# EAGLE board BC127_Breakout-Panel-v10 (EAGLE 6.5.0), part 1 of 3
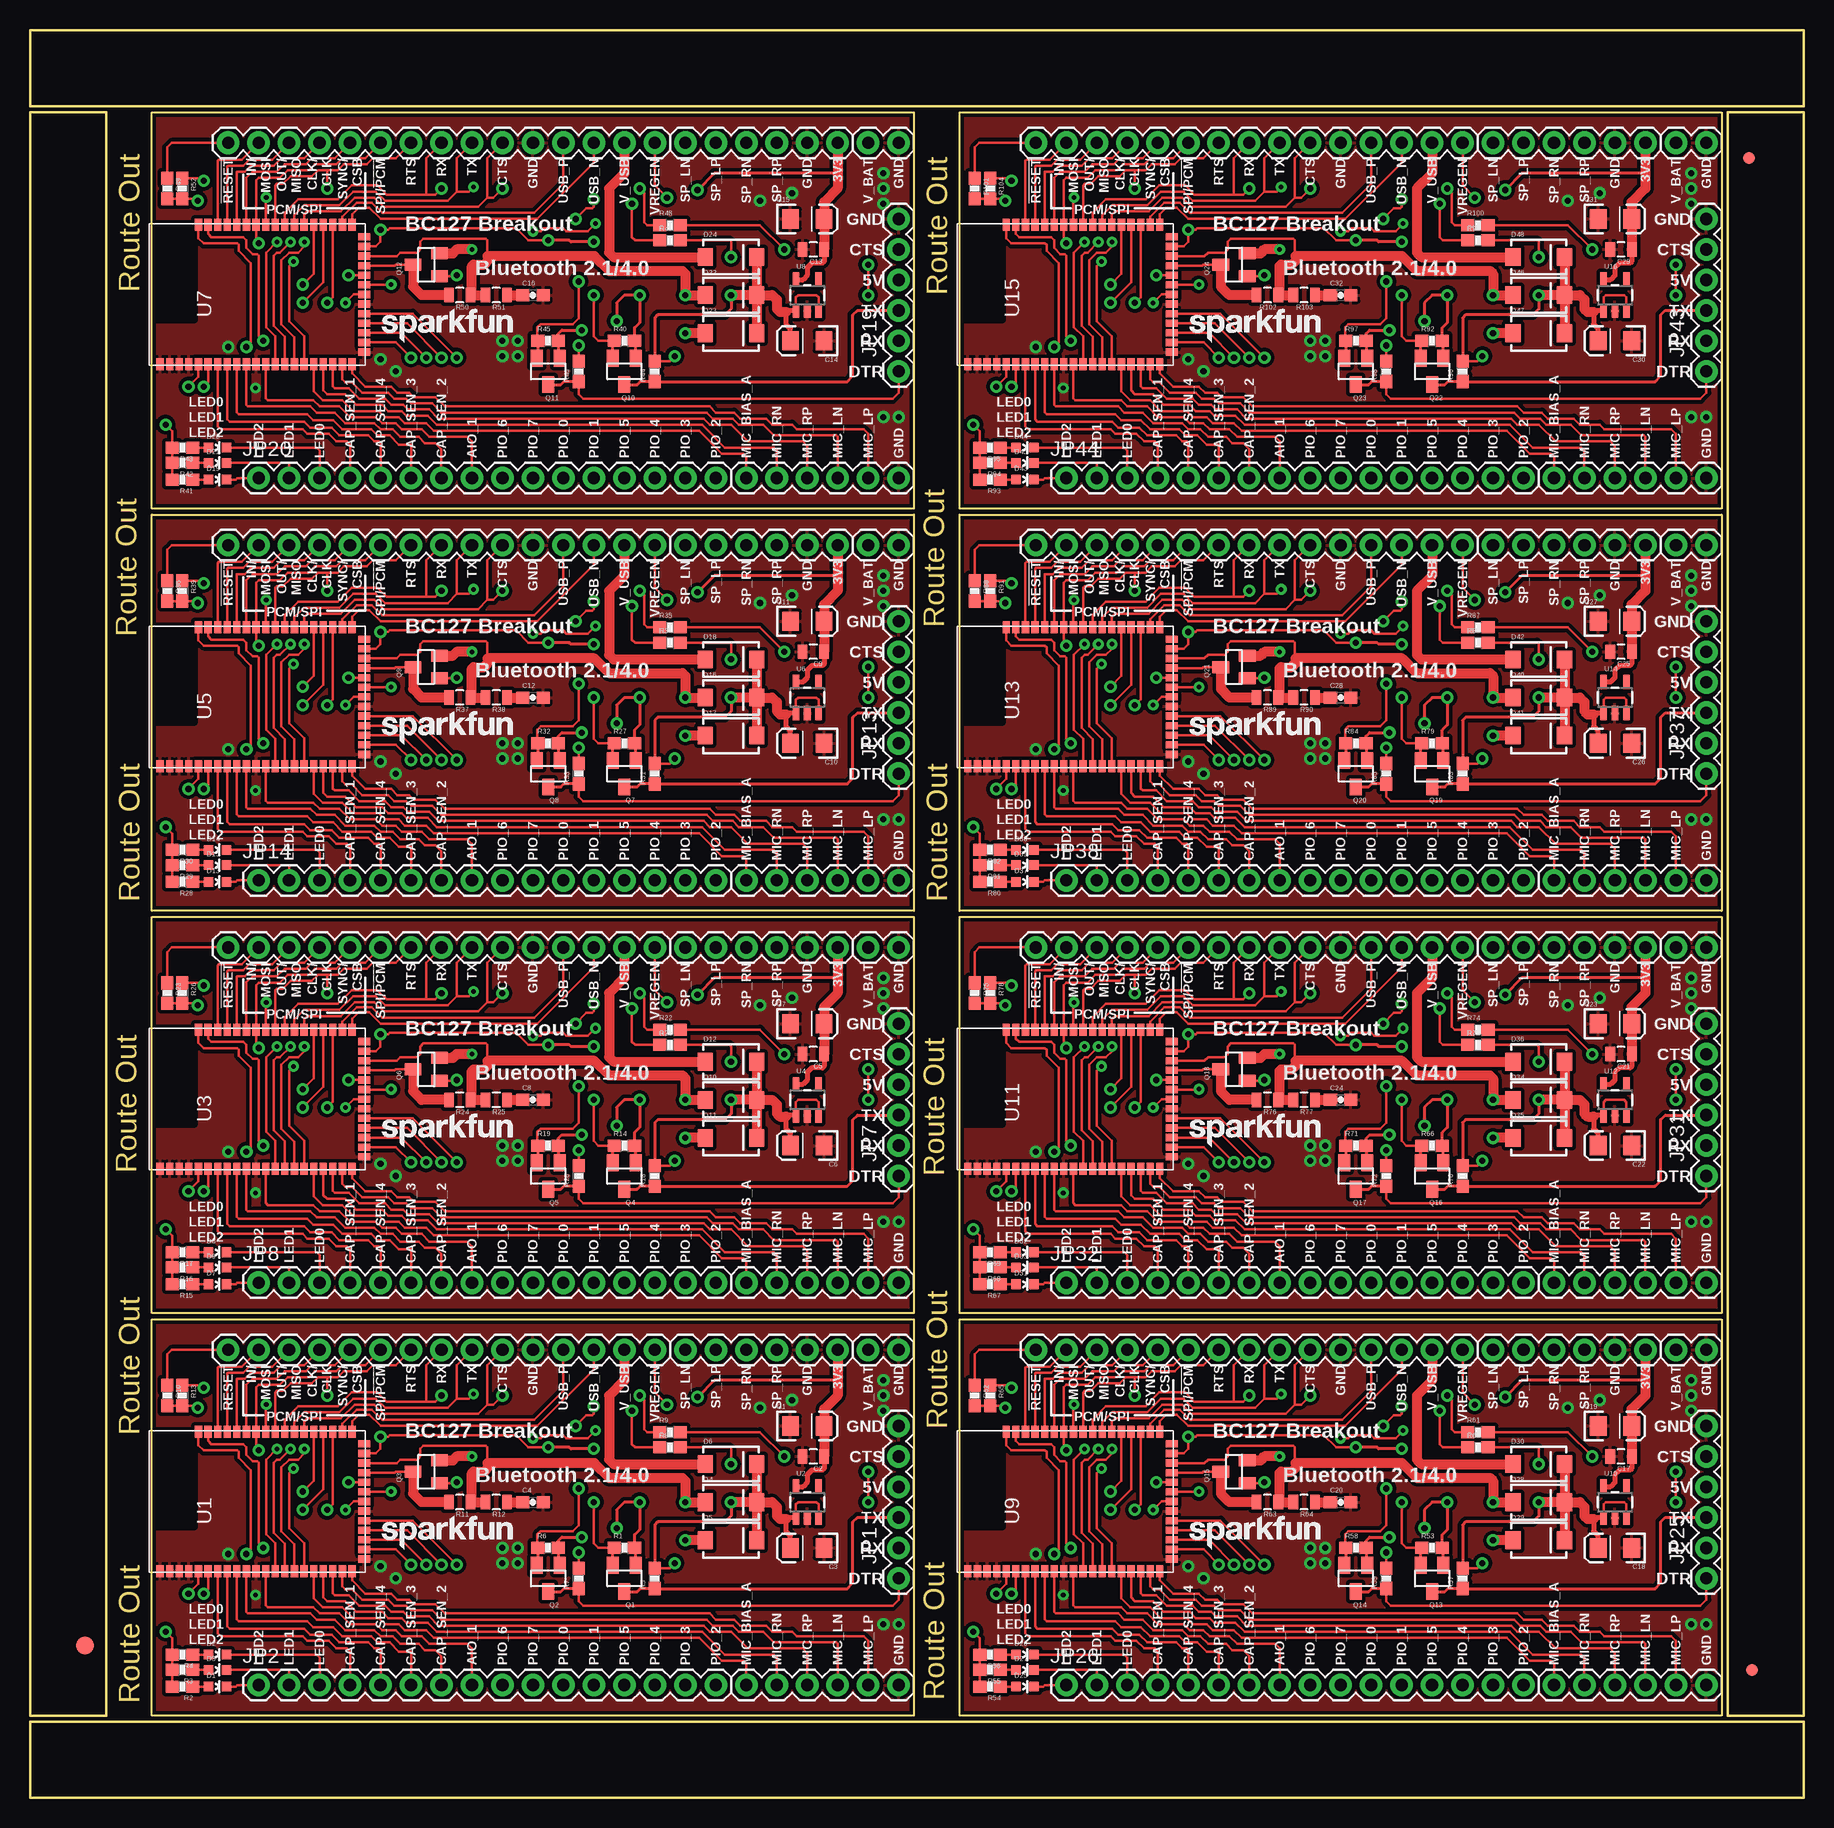
[diagram p0: board, top side]
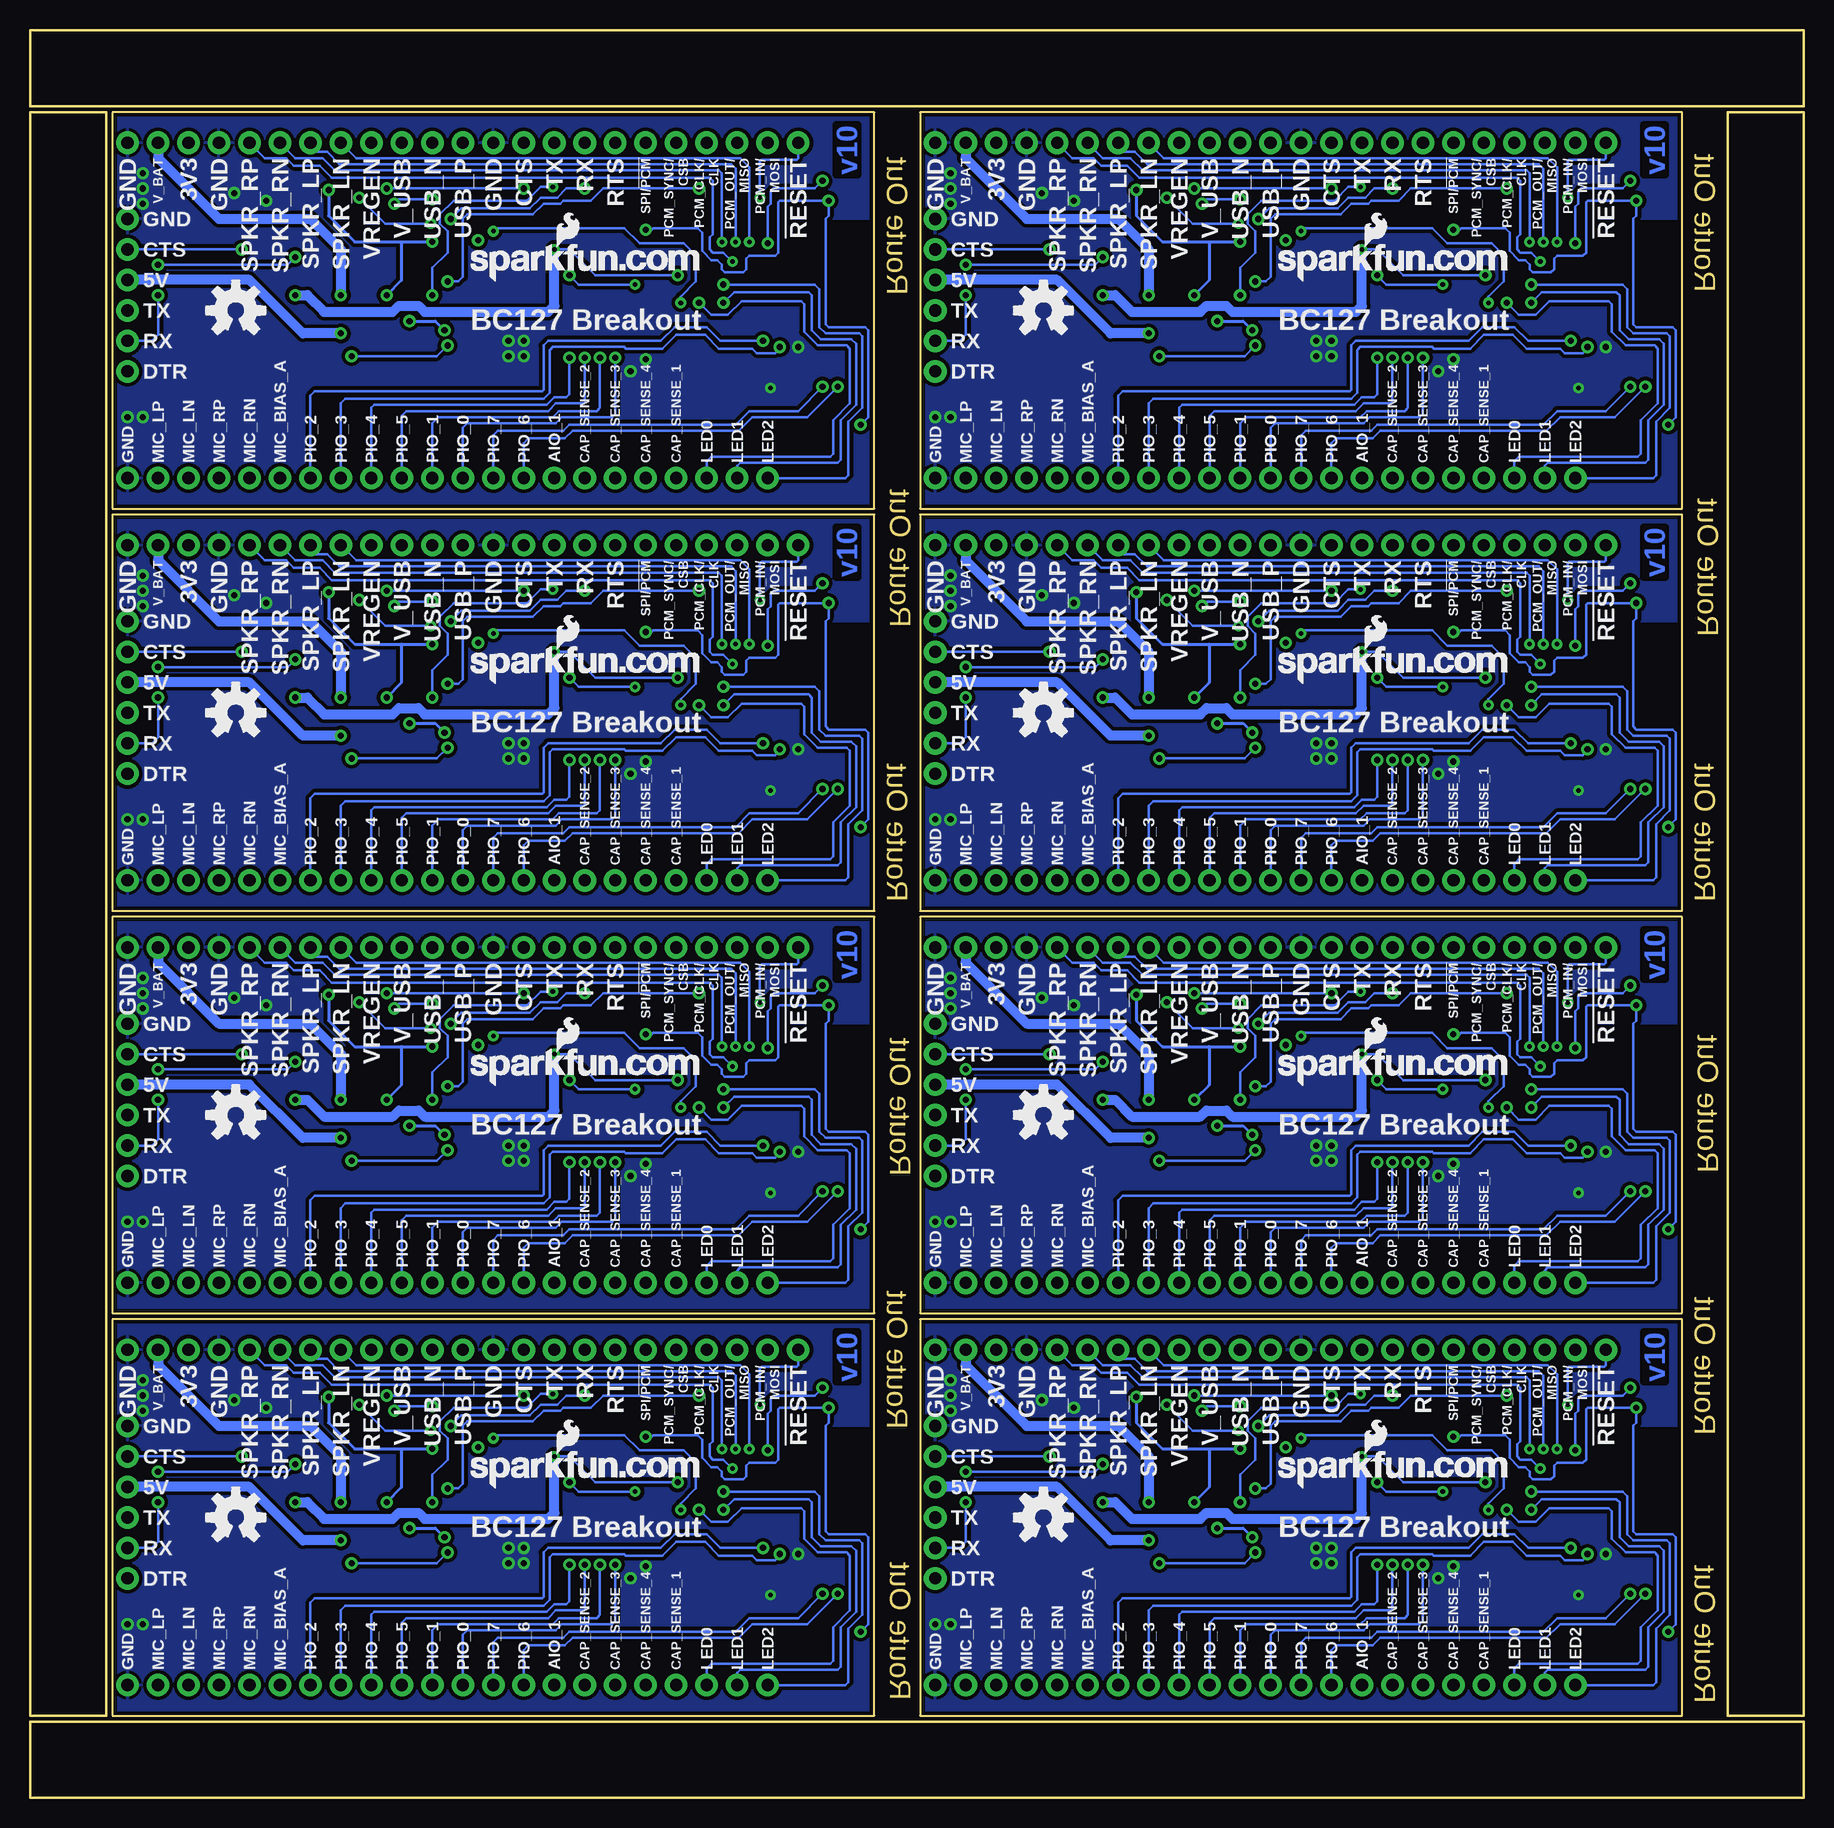
[diagram p1: board, bottom side, seen from below]

Size 147.83 x 147.32 mm. Coordinates in mm from the lower left corner, seen from the top.
Outline: 10.16,6.86 10.16,39.88 73.66,39.88 73.66,6.86 10.16,6.86
Outline: 10.16,40.39 10.16,73.41 73.66,73.41 73.66,40.39 10.16,40.39
Outline: 10.16,73.91 10.16,106.93 73.66,106.93 73.66,73.91 10.16,73.91
Outline: 10.16,107.44 10.16,140.46 73.66,140.46 73.66,107.44 10.16,107.44
Outline: 77.47,6.86 77.47,39.88 140.97,39.88 140.97,6.86 77.47,6.86
Outline: 77.47,40.39 77.47,73.41 140.97,73.41 140.97,40.39 77.47,40.39
Outline: 77.47,73.91 77.47,106.93 140.97,106.93 140.97,73.91 77.47,73.91
Outline: 77.47,107.44 77.47,140.46 140.97,140.46 140.97,107.44 77.47,107.44
Outline: 6.35,6.86 6.35,140.46 0,140.46 0,6.86 6.35,6.86
Outline: 0,0 147.83,0 147.83,6.35 0,6.35 0,0
Outline: 147.83,6.86 147.83,140.46 141.48,140.46 141.48,6.86 147.83,6.86
Outline: 147.83,147.32 0,147.32 0,140.97 147.83,140.97 147.83,147.32
Copper layers (1*16): Top 0.035mm / dielectric 1.5mm / Bottom 0.035mm
Design rules "Sparkfun *": minimum track width 8mil, minimum drill 20mil, track to track 8mil, track to pad 8mil, pad to pad 8mil, via to via 8mil, smd to smd 8mil, copper to edge 8mil, drill to drill 8mil, minimum pad ring 12mil, minimum via ring 10mil, stop-mask expansion 4mil, vias tented up to drill 20mil, thermal gap 10mil

## Footprints (pad centres in the part's own frame; a part is rotated, then mirrored left to right if it is on the bottom)
EIA3216 = smd 1.4 x 1.6: A 1.4,0; C -1.4,0
0805 = smd 0.8 x 1.2: 1 -0.9,0; 2 0.9,0
0603-CAP = smd 1.1 x 1: 1 -0.85,0; 2 0.85,0
LED-0603 = smd 0.8 x 0.8: A 0,-0.75; C 0,0.75
SMA-DIODE = smd 1.27 x 1.47: A -2.15,0; C 2.15,0
FIDUCIAL-1.5X3 = smd 1.5 x 1.5: 1 0,0
FIDUCIAL-1X2 = smd 1 x 1: 1 0,0
FTDI_BASIC = drill 1.016 pad 1.88: CTS 10.16,0; DTR 0,0; GND 12.7,0; RXI 2.54,0; TXO 5.08,0; VCC 7.62,0
1X16 = drill 1.016 pad 1.88: 1 0,0; 2 2.54,0; 3 5.08,0; 4 7.62,0; 5 10.16,0; 6 12.7,0; 7 15.24,0; 8 17.78,0; 9 20.32,0; 10 22.86,0; 11 25.4,0; 12 27.94,0; 13 30.48,0; 14 33.02,0; 15 35.56,0; 16 38.1,0
1X15 = drill 1.016 pad 1.88: 1 0,0; 2 2.54,0; 3 5.08,0; 4 7.62,0; 5 10.16,0; 6 12.7,0; 7 15.24,0; 8 17.78,0; 9 20.32,0; 10 22.86,0; 11 25.4,0; 12 27.94,0; 13 30.48,0; 14 33.02,0; 15 35.56,0
1X06 = drill 1.016 pad 1.88: 1 0,0; 2 2.54,0; 3 5.08,0; 4 7.62,0; 5 10.16,0; 6 12.7,0
1X02 = drill 1.016 pad 1.88: 1 0,0; 2 2.54,0
SOT23 = smd 1 x 1.4: 1 -0.95,-1.1; 2 0.95,-1.1; 3 0,1.1
0603-RES = smd 1.1 x 1: 1 -0.85,0; 2 0.85,0
BC127 = smd 1 x 0.6: 1 -5.8,8.1; 2 -5.8,7.3; 3 -5.8,6.5; 4 -5.8,5.7; 5 -5.8,4.9; 6 -5.8,4.1; 7 -5.8,3.3; 8 -5.8,2.5; 9 -5.8,1.7; 10 -5.8,0.9; 11 -5.8,0.1; 12 -5.8,-0.7; 13 -5.8,-1.5; 14 -5.8,-2.3; 15 -5.8,-3.1; 16 -5.8,-3.9; 17 -5.8,-4.7; 18 -5.8,-5.5; 19 -5.8,-6.3; 20 -5.8,-7.1; 21 -5.8,-7.9; 35 5.8,-7.9; 36 5.8,-7.1; 37 5.8,-6.3; 38 5.8,-5.5; 39 5.8,-4.7; 40 5.8,-3.9; 41 5.8,-3.1; 42 5.8,-2.3; 43 5.8,-1.5; 44 5.8,-0.7; 45 5.8,0.1; 46 5.8,0.9; 47 5.8,1.7; 48 5.8,2.5; 49 5.8,3.3; 50 5.8,4.1; 51 5.8,4.9 | smd 0.6 x 1: 22 -4.8,-8.9; 23 -4,-8.9; 24 -3.2,-8.9; 25 -2.4,-8.9; 26 -1.6,-8.9; 27 -0.8,-8.9; 28 0,-8.9; 29 0.8,-8.9; 30 1.6,-8.9; 31 2.4,-8.9; 32 3.2,-8.9; 33 4,-8.9; 34 4.8,-8.9
SOT23-5 = smd 0.55 x 1.2: 1 -0.95,-1.3; 2 0,-1.3; 3 0.95,-1.3; 4 0.95,1.3; 5 -0.95,1.3

## Placement (x,y rotation side)
C1  10uF  [EIA3216]  64.77,30.99 0 top
C2  1uF  [0805]  65.28,28.45 180 top
C3  10uF  [EIA3216]  64.77,20.83 180 top
C4  4.7uF  [0603-CAP]  41.91,24.64 0 top
C5  1uF  [0805]  65.28,61.98 180 top
C6  10uF  [EIA3216]  64.77,54.36 180 top
C7  10uF  [EIA3216]  64.77,64.52 0 top
C8  4.7uF  [0603-CAP]  41.91,58.17 0 top
C9  1uF  [0805]  65.28,95.5 180 top
C10  10uF  [EIA3216]  64.77,87.88 180 top
C11  10uF  [EIA3216]  64.77,98.04 0 top
C12  4.7uF  [0603-CAP]  41.91,91.69 0 top
C13  1uF  [0805]  65.28,129.03 180 top
C14  10uF  [EIA3216]  64.77,121.41 180 top
C15  10uF  [EIA3216]  64.77,131.57 0 top
C16  4.7uF  [0603-CAP]  41.91,125.22 0 top
C17  1uF  [0805]  132.59,28.45 180 top
C18  10uF  [EIA3216]  132.08,20.83 180 top
C19  10uF  [EIA3216]  132.08,30.99 0 top
C20  4.7uF  [0603-CAP]  109.22,24.64 0 top
C21  1uF  [0805]  132.59,61.98 180 top
C22  10uF  [EIA3216]  132.08,54.36 180 top
C23  10uF  [EIA3216]  132.08,64.52 0 top
C24  4.7uF  [0603-CAP]  109.22,58.17 0 top
C25  1uF  [0805]  132.59,95.5 180 top
C26  10uF  [EIA3216]  132.08,87.88 180 top
C27  10uF  [EIA3216]  132.08,98.04 0 top
C28  4.7uF  [0603-CAP]  109.22,91.69 0 top
C29  1uF  [0805]  132.59,129.03 180 top
C30  10uF  [EIA3216]  132.08,121.41 180 top
C31  10uF  [EIA3216]  132.08,131.57 0 top
C32  4.7uF  [0603-CAP]  109.22,125.22 0 top
D1  GREEN  [LED-0603]  15.62,9.27 270 top
D2  RED  [LED-0603]  15.62,11.94 270 top
D3  BLUE  [LED-0603]  15.62,10.67 270 top
D4  BA340A  [SMA-DIODE]  58.42,24.64 0 top
D5  BA340A  [SMA-DIODE]  58.42,21.46 0 top
D6  BA340A  [SMA-DIODE]  58.42,27.81 0 top
D7  GREEN  [LED-0603]  15.62,42.8 270 top
D8  RED  [LED-0603]  15.62,45.47 270 top
D9  BLUE  [LED-0603]  15.62,44.2 270 top
D10  BA340A  [SMA-DIODE]  58.42,58.17 0 top
D11  BA340A  [SMA-DIODE]  58.42,54.99 0 top
D12  BA340A  [SMA-DIODE]  58.42,61.34 0 top
D13  GREEN  [LED-0603]  15.62,76.33 270 top
D14  RED  [LED-0603]  15.62,78.99 270 top
D15  BLUE  [LED-0603]  15.62,77.72 270 top
D16  BA340A  [SMA-DIODE]  58.42,91.69 0 top
D17  BA340A  [SMA-DIODE]  58.42,88.52 0 top
D18  BA340A  [SMA-DIODE]  58.42,94.87 0 top
D19  GREEN  [LED-0603]  15.62,109.86 270 top
D20  RED  [LED-0603]  15.62,112.52 270 top
D21  BLUE  [LED-0603]  15.62,111.25 270 top
D22  BA340A  [SMA-DIODE]  58.42,125.22 0 top
D23  BA340A  [SMA-DIODE]  58.42,122.05 0 top
D24  BA340A  [SMA-DIODE]  58.42,128.4 0 top
D25  GREEN  [LED-0603]  82.93,9.27 270 top
D26  RED  [LED-0603]  82.93,11.94 270 top
D27  BLUE  [LED-0603]  82.93,10.67 270 top
D28  BA340A  [SMA-DIODE]  125.73,24.64 0 top
D29  BA340A  [SMA-DIODE]  125.73,21.46 0 top
D30  BA340A  [SMA-DIODE]  125.73,27.81 0 top
D31  GREEN  [LED-0603]  82.93,42.8 270 top
D32  RED  [LED-0603]  82.93,45.47 270 top
D33  BLUE  [LED-0603]  82.93,44.2 270 top
D34  BA340A  [SMA-DIODE]  125.73,58.17 0 top
D35  BA340A  [SMA-DIODE]  125.73,54.99 0 top
D36  BA340A  [SMA-DIODE]  125.73,61.34 0 top
D37  GREEN  [LED-0603]  82.93,76.33 270 top
D38  RED  [LED-0603]  82.93,78.99 270 top
D39  BLUE  [LED-0603]  82.93,77.72 270 top
D40  BA340A  [SMA-DIODE]  125.73,91.69 0 top
D41  BA340A  [SMA-DIODE]  125.73,88.52 0 top
D42  BA340A  [SMA-DIODE]  125.73,94.87 0 top
D43  GREEN  [LED-0603]  82.93,109.86 270 top
D44  RED  [LED-0603]  82.93,112.52 270 top
D45  BLUE  [LED-0603]  82.93,111.25 270 top
D46  BA340A  [SMA-DIODE]  125.73,125.22 0 top
D47  BA340A  [SMA-DIODE]  125.73,122.05 0 top
D48  BA340A  [SMA-DIODE]  125.73,128.4 0 top
E$1  [FIDUCIAL-1.5X3]  4.57,12.7 0 top
E$4  [FIDUCIAL-1X2]  143.51,10.67 0 top
E$5  [FIDUCIAL-1X2]  143.26,136.65 180 top
JP1  FTDI_BASICPTH  [FTDI_BASIC]  72.39,18.29 90 top
JP2  M16PTH  [1X16]  19.05,9.4 0 top
JP3  M15  [1X15]  16.51,37.34 0 top
JP4  [1X06]  54.61,37.34 0 top
JP5  [1X06]  72.39,9.4 180 top
JP6  M02PTH  [1X02]  69.85,37.34 0 top
JP7  FTDI_BASICPTH  [FTDI_BASIC]  72.39,51.82 90 top
JP8  M16PTH  [1X16]  19.05,42.93 0 top
JP9  M15  [1X15]  16.51,70.87 0 top
JP10  [1X06]  54.61,70.87 0 top
JP11  [1X06]  72.39,42.93 180 top
JP12  M02PTH  [1X02]  69.85,70.87 0 top
JP13  FTDI_BASICPTH  [FTDI_BASIC]  72.39,85.34 90 top
JP14  M16PTH  [1X16]  19.05,76.45 0 top
JP15  M15  [1X15]  16.51,104.39 0 top
JP16  [1X06]  54.61,104.39 0 top
JP17  [1X06]  72.39,76.45 180 top
JP18  M02PTH  [1X02]  69.85,104.39 0 top
JP19  FTDI_BASICPTH  [FTDI_BASIC]  72.39,118.87 90 top
JP20  M16PTH  [1X16]  19.05,109.98 0 top
JP21  M15  [1X15]  16.51,137.92 0 top
JP22  [1X06]  54.61,137.92 0 top
JP23  [1X06]  72.39,109.98 180 top
JP24  M02PTH  [1X02]  69.85,137.92 0 top
JP25  FTDI_BASICPTH  [FTDI_BASIC]  139.7,18.29 90 top
JP26  M16PTH  [1X16]  86.36,9.4 0 top
JP27  M15  [1X15]  83.82,37.34 0 top
JP28  [1X06]  121.92,37.34 0 top
JP29  [1X06]  139.7,9.4 180 top
JP30  M02PTH  [1X02]  137.16,37.34 0 top
JP31  FTDI_BASICPTH  [FTDI_BASIC]  139.7,51.82 90 top
JP32  M16PTH  [1X16]  86.36,42.93 0 top
JP33  M15  [1X15]  83.82,70.87 0 top
JP34  [1X06]  121.92,70.87 0 top
JP35  [1X06]  139.7,42.93 180 top
JP36  M02PTH  [1X02]  137.16,70.87 0 top
JP37  FTDI_BASICPTH  [FTDI_BASIC]  139.7,85.34 90 top
JP38  M16PTH  [1X16]  86.36,76.45 0 top
JP39  M15  [1X15]  83.82,104.39 0 top
JP40  [1X06]  121.92,104.39 0 top
JP41  [1X06]  139.7,76.45 180 top
JP42  M02PTH  [1X02]  137.16,104.39 0 top
JP43  FTDI_BASICPTH  [FTDI_BASIC]  139.7,118.87 90 top
JP44  M16PTH  [1X16]  86.36,109.98 0 top
JP45  M15  [1X15]  83.82,137.92 0 top
JP46  [1X06]  121.92,137.92 0 top
JP47  [1X06]  139.7,109.98 180 top
JP48  M02PTH  [1X02]  137.16,137.92 0 top
LOGO1  OSHW-LOGOM  [OSHW-LOGO-M]  63.37,23.37 0 bottom
LOGO2  LOGO-SFENEW  [SFE-NEW-WEBLOGO]  43.81,25.78 0 bottom
LOGO3  SFE_LOGO_NAME.1_INCH  [SFE_LOGO_NAME_.1]  28.83,20.19 0 top
LOGO4  OSHW-LOGOM  [OSHW-LOGO-M]  63.37,56.9 0 bottom
LOGO5  LOGO-SFENEW  [SFE-NEW-WEBLOGO]  43.81,59.31 0 bottom
LOGO6  SFE_LOGO_NAME.1_INCH  [SFE_LOGO_NAME_.1]  28.83,53.72 0 top
LOGO7  OSHW-LOGOM  [OSHW-LOGO-M]  63.37,90.42 0 bottom
LOGO8  LOGO-SFENEW  [SFE-NEW-WEBLOGO]  43.81,92.84 0 bottom
LOGO9  SFE_LOGO_NAME.1_INCH  [SFE_LOGO_NAME_.1]  28.83,87.25 0 top
LOGO10  OSHW-LOGOM  [OSHW-LOGO-M]  63.37,123.95 0 bottom
LOGO11  LOGO-SFENEW  [SFE-NEW-WEBLOGO]  43.81,126.36 0 bottom
LOGO12  SFE_LOGO_NAME.1_INCH  [SFE_LOGO_NAME_.1]  28.83,120.78 0 top
LOGO13  OSHW-LOGOM  [OSHW-LOGO-M]  130.68,23.37 0 bottom
LOGO14  LOGO-SFENEW  [SFE-NEW-WEBLOGO]  111.12,25.78 0 bottom
LOGO15  SFE_LOGO_NAME.1_INCH  [SFE_LOGO_NAME_.1]  96.14,20.19 0 top
LOGO16  OSHW-LOGOM  [OSHW-LOGO-M]  130.68,56.9 0 bottom
LOGO17  LOGO-SFENEW  [SFE-NEW-WEBLOGO]  111.12,59.31 0 bottom
LOGO18  SFE_LOGO_NAME.1_INCH  [SFE_LOGO_NAME_.1]  96.14,53.72 0 top
LOGO19  OSHW-LOGOM  [OSHW-LOGO-M]  130.68,90.42 0 bottom
LOGO20  LOGO-SFENEW  [SFE-NEW-WEBLOGO]  111.12,92.84 0 bottom
LOGO21  SFE_LOGO_NAME.1_INCH  [SFE_LOGO_NAME_.1]  96.14,87.25 0 top
LOGO22  OSHW-LOGOM  [OSHW-LOGO-M]  130.68,123.95 0 bottom
LOGO23  LOGO-SFENEW  [SFE-NEW-WEBLOGO]  111.12,126.36 0 bottom
LOGO24  SFE_LOGO_NAME.1_INCH  [SFE_LOGO_NAME_.1]  96.14,120.78 0 top
Q1  MOSFET-NCHANNELBSS138  [SOT23]  49.53,18.29 180 top
Q2  MOSFET-NCHANNELBSS138  [SOT23]  43.18,18.29 180 top
Q3  MMBT4403  [SOT23]  33.02,27.18 90 top
Q4  MOSFET-NCHANNELBSS138  [SOT23]  49.53,51.82 180 top
Q5  MOSFET-NCHANNELBSS138  [SOT23]  43.18,51.82 180 top
Q6  MMBT4403  [SOT23]  33.02,60.71 90 top
Q7  MOSFET-NCHANNELBSS138  [SOT23]  49.53,85.34 180 top
Q8  MOSFET-NCHANNELBSS138  [SOT23]  43.18,85.34 180 top
Q9  MMBT4403  [SOT23]  33.02,94.23 90 top
Q10  MOSFET-NCHANNELBSS138  [SOT23]  49.53,118.87 180 top
Q11  MOSFET-NCHANNELBSS138  [SOT23]  43.18,118.87 180 top
Q12  MMBT4403  [SOT23]  33.02,127.76 90 top
Q13  MOSFET-NCHANNELBSS138  [SOT23]  116.84,18.29 180 top
Q14  MOSFET-NCHANNELBSS138  [SOT23]  110.49,18.29 180 top
Q15  MMBT4403  [SOT23]  100.33,27.18 90 top
Q16  MOSFET-NCHANNELBSS138  [SOT23]  116.84,51.82 180 top
Q17  MOSFET-NCHANNELBSS138  [SOT23]  110.49,51.82 180 top
Q18  MMBT4403  [SOT23]  100.33,60.71 90 top
Q19  MOSFET-NCHANNELBSS138  [SOT23]  116.84,85.34 180 top
Q20  MOSFET-NCHANNELBSS138  [SOT23]  110.49,85.34 180 top
Q21  MMBT4403  [SOT23]  100.33,94.23 90 top
Q22  MOSFET-NCHANNELBSS138  [SOT23]  116.84,118.87 180 top
Q23  MOSFET-NCHANNELBSS138  [SOT23]  110.49,118.87 180 top
Q24  MMBT4403  [SOT23]  100.33,127.76 90 top
R1  10K  [0603-RES]  49.53,20.83 0 top
R2  240  [0603-RES]  12.7,9.27 180 top
R3  240  [0603-RES]  12.7,10.67 180 top
R4  240  [0603-RES]  12.7,11.94 180 top
R5  10K  [0603-RES]  52.07,18.29 90 top
R6  10K  [0603-RES]  43.18,20.83 0 top
R7  10K  [0603-RES]  45.72,18.29 90 top
R8  10K  [0603-RES]  53.34,29.21 0 top
R9  10K  [0603-RES]  53.34,30.48 0 top
R10  10K  [0603-RES]  11.43,33.53 270 top
R11  0.75  [0805]  35.81,24.64 180 top
R12  0.22  [0805]  38.86,24.64 180 top
R13  10K  [0603-RES]  12.7,33.53 270 top
R14  10K  [0603-RES]  49.53,54.36 0 top
R15  240  [0603-RES]  12.7,42.8 180 top
R16  240  [0603-RES]  12.7,44.2 180 top
R17  240  [0603-RES]  12.7,45.47 180 top
R18  10K  [0603-RES]  52.07,51.82 90 top
R19  10K  [0603-RES]  43.18,54.36 0 top
R20  10K  [0603-RES]  45.72,51.82 90 top
R21  10K  [0603-RES]  53.34,62.74 0 top
R22  10K  [0603-RES]  53.34,64.01 0 top
R23  10K  [0603-RES]  11.43,67.06 270 top
R24  0.75  [0805]  35.81,58.17 180 top
R25  0.22  [0805]  38.86,58.17 180 top
R26  10K  [0603-RES]  12.7,67.06 270 top
R27  10K  [0603-RES]  49.53,87.88 0 top
R28  240  [0603-RES]  12.7,76.33 180 top
R29  240  [0603-RES]  12.7,77.72 180 top
R30  240  [0603-RES]  12.7,78.99 180 top
R31  10K  [0603-RES]  52.07,85.34 90 top
R32  10K  [0603-RES]  43.18,87.88 0 top
R33  10K  [0603-RES]  45.72,85.34 90 top
R34  10K  [0603-RES]  53.34,96.27 0 top
R35  10K  [0603-RES]  53.34,97.54 0 top
R36  10K  [0603-RES]  11.43,100.58 270 top
R37  0.75  [0805]  35.81,91.69 180 top
R38  0.22  [0805]  38.86,91.69 180 top
R39  10K  [0603-RES]  12.7,100.58 270 top
R40  10K  [0603-RES]  49.53,121.41 0 top
R41  240  [0603-RES]  12.7,109.86 180 top
R42  240  [0603-RES]  12.7,111.25 180 top
R43  240  [0603-RES]  12.7,112.52 180 top
R44  10K  [0603-RES]  52.07,118.87 90 top
R45  10K  [0603-RES]  43.18,121.41 0 top
R46  10K  [0603-RES]  45.72,118.87 90 top
R47  10K  [0603-RES]  53.34,129.79 0 top
R48  10K  [0603-RES]  53.34,131.06 0 top
R49  10K  [0603-RES]  11.43,134.11 270 top
R50  0.75  [0805]  35.81,125.22 180 top
R51  0.22  [0805]  38.86,125.22 180 top
R52  10K  [0603-RES]  12.7,134.11 270 top
R53  10K  [0603-RES]  116.84,20.83 0 top
R54  240  [0603-RES]  80.01,9.27 180 top
R55  240  [0603-RES]  80.01,10.67 180 top
R56  240  [0603-RES]  80.01,11.94 180 top
R57  10K  [0603-RES]  119.38,18.29 90 top
R58  10K  [0603-RES]  110.49,20.83 0 top
R59  10K  [0603-RES]  113.03,18.29 90 top
R60  10K  [0603-RES]  120.65,29.21 0 top
R61  10K  [0603-RES]  120.65,30.48 0 top
R62  10K  [0603-RES]  78.74,33.53 270 top
R63  0.75  [0805]  103.12,24.64 180 top
R64  0.22  [0805]  106.17,24.64 180 top
R65  10K  [0603-RES]  80.01,33.53 270 top
R66  10K  [0603-RES]  116.84,54.36 0 top
R67  240  [0603-RES]  80.01,42.8 180 top
R68  240  [0603-RES]  80.01,44.2 180 top
R69  240  [0603-RES]  80.01,45.47 180 top
R70  10K  [0603-RES]  119.38,51.82 90 top
R71  10K  [0603-RES]  110.49,54.36 0 top
R72  10K  [0603-RES]  113.03,51.82 90 top
R73  10K  [0603-RES]  120.65,62.74 0 top
R74  10K  [0603-RES]  120.65,64.01 0 top
R75  10K  [0603-RES]  78.74,67.06 270 top
R76  0.75  [0805]  103.12,58.17 180 top
R77  0.22  [0805]  106.17,58.17 180 top
R78  10K  [0603-RES]  80.01,67.06 270 top
R79  10K  [0603-RES]  116.84,87.88 0 top
R80  240  [0603-RES]  80.01,76.33 180 top
R81  240  [0603-RES]  80.01,77.72 180 top
R82  240  [0603-RES]  80.01,78.99 180 top
R83  10K  [0603-RES]  119.38,85.34 90 top
R84  10K  [0603-RES]  110.49,87.88 0 top
R85  10K  [0603-RES]  113.03,85.34 90 top
R86  10K  [0603-RES]  120.65,96.27 0 top
R87  10K  [0603-RES]  120.65,97.54 0 top
R88  10K  [0603-RES]  78.74,100.58 270 top
R89  0.75  [0805]  103.12,91.69 180 top
R90  0.22  [0805]  106.17,91.69 180 top
R91  10K  [0603-RES]  80.01,100.58 270 top
R92  10K  [0603-RES]  116.84,121.41 0 top
R93  240  [0603-RES]  80.01,109.86 180 top
R94  240  [0603-RES]  80.01,111.25 180 top
R95  240  [0603-RES]  80.01,112.52 180 top
R96  10K  [0603-RES]  119.38,118.87 90 top
R97  10K  [0603-RES]  110.49,121.41 0 top
R98  10K  [0603-RES]  113.03,118.87 90 top
R99  10K  [0603-RES]  120.65,129.79 0 top
R100  10K  [0603-RES]  120.65,131.06 0 top
R101  10K  [0603-RES]  78.74,134.11 270 top
R102  0.75  [0805]  103.12,125.22 180 top
R103  0.22  [0805]  106.17,125.22 180 top
R104  10K  [0603-RES]  80.01,134.11 270 top
U1  [BC127]  18.94,24.7 90 top
U2  MIC5219 3.3V  [SOT23-5]  64.77,24.64 0 top
U3  [BC127]  18.94,58.22 90 top
U4  MIC5219 3.3V  [SOT23-5]  64.77,58.17 0 top
U5  [BC127]  18.94,91.75 90 top
U6  MIC5219 3.3V  [SOT23-5]  64.77,91.69 0 top
U7  [BC127]  18.94,125.28 90 top
U8  MIC5219 3.3V  [SOT23-5]  64.77,125.22 0 top
U9  [BC127]  86.25,24.7 90 top
U10  MIC5219 3.3V  [SOT23-5]  132.08,24.64 0 top
U11  [BC127]  86.25,58.22 90 top
U12  MIC5219 3.3V  [SOT23-5]  132.08,58.17 0 top
U13  [BC127]  86.25,91.75 90 top
U14  MIC5219 3.3V  [SOT23-5]  132.08,91.69 0 top
U15  [BC127]  86.25,125.28 90 top
U16  MIC5219 3.3V  [SOT23-5]  132.08,125.22 0 top

## Library data of the parts
C1 C3 C6 C7 C10 C11 C14 C15 C18 C19 C22 C23 C26 C27 C30 C31 = SparkFun-Capacitors; PROD_ID: CAP-00811
C2 C5 C9 C13 C17 C21 C25 C29 = SparkFun-Capacitors; PROD_ID: CAP-08064
C4 C8 C12 C16 C20 C24 C28 C32 = SparkFun-Capacitors; PROD_ID: CAP-08280
D1 D7 D13 D19 D25 D31 D37 D43 = SparkFun-LED; PROD_ID: DIO-00821
D2 D8 D14 D20 D26 D32 D38 D44 = SparkFun-LED; PROD_ID: DIO-00819
D3 D9 D15 D21 D27 D33 D39 D45 = SparkFun-LED; PROD_ID: DIO-08575
D4-D6 D10-D12 D16-D18 D22-D24 D28-D30 D34-D36 D40-D42 D46-D48 = SparkFun-DiscreteSemi; PROD_ID: DIO-09886
E$1 E$4 E$5 LOGO1-LOGO24 = SparkFun-Aesthetics
JP1-JP48 = SparkFun-Connectors
Q1 Q2 Q4 Q5 Q7 Q8 Q10 Q11 Q13 Q14 Q16 Q17 Q19 Q20 Q22 Q23 = SparkFun-DiscreteSemi; PROD_ID: TRANS-00830
Q3 Q6 Q9 Q12 Q15 Q18 Q21 Q24 = SparkFun-DiscreteSemi; PROD_ID: TRANS-09245
R1 R5-R10 R13 R14 R18-R23 R26 R27 R31-R36 R39 R40 R44-R49 R52 R53 R57-R62 R65 R66 R70-R75 R78 R79 R83-R88 R91 R92 R96-R101 R104 = SparkFun-Resistors; PROD_ID: RES-00824
R2-R4 R15-R17 R28-R30 R41-R43 R54-R56 R67-R69 R80-R82 R93-R95 = SparkFun-Resistors; PROD_ID: RES-07849
R11 R24 R37 R50 R63 R76 R89 R102 = SparkFun-Resistors; PROD_ID: RES-08474
R12 R25 R38 R51 R64 R77 R90 R103 = SparkFun-Resistors; PROD_ID: RES-09883
U1 U3 U5 U7 U9 U11 U13 U15 = SparkFun-RF
U2 U4 U6 U8 U10 U12 U14 U16 = SparkFun-PowerIC; PROD_ID: VREG-09872

## Nets
3.3V: C1.A C2.1 JP4.6 Q1.1 Q2.1 R1.2 R2.2 R3.2 R4.2 R6.2 R10.2 R13.2 U1.33 U2.5
3.3V1: C5.1 C7.A JP10.6 Q4.1 Q5.1 R14.2 R15.2 R16.2 R17.2 R19.2 R23.2 R26.2 U3.33 U4.5
3.3V2: C9.1 C11.A JP16.6 Q7.1 Q8.1 R27.2 R28.2 R29.2 R30.2 R32.2 R36.2 R39.2 U5.33 U6.5
3.3V3: C13.1 C15.A JP22.6 Q10.1 Q11.1 R40.2 R41.2 R42.2 R43.2 R45.2 R49.2 R52.2 U7.33 U8.5
3.3V4: C17.1 C19.A JP28.6 Q13.1 Q14.1 R53.2 R54.2 R55.2 R56.2 R58.2 R62.2 R65.2 U9.33 U10.5
3.3V5: C21.1 C23.A JP34.6 Q16.1 Q17.1 R66.2 R67.2 R68.2 R69.2 R71.2 R75.2 R78.2 U11.33 U12.5
3.3V6: C25.1 C27.A JP40.6 Q19.1 Q20.1 R79.2 R80.2 R81.2 R82.2 R84.2 R88.2 R91.2 U13.33 U14.5
3.3V7: C29.1 C31.A JP46.6 Q22.1 Q23.1 R92.2 R93.2 R94.2 R95.2 R97.2 R101.2 R104.2 U15.33 U16.5
5V_CTS: JP1.CTS R9.2
5V_CTS1: JP7.CTS R22.2
5V_CTS2: JP13.CTS R35.2
5V_CTS3: JP19.CTS R48.2
5V_CTS4: JP25.CTS R61.2
5V_CTS5: JP31.CTS R74.2
5V_CTS6: JP37.CTS R87.2
5V_CTS7: JP43.CTS R100.2
5V_RTS: JP1.DTR Q2.3 R7.1
5V_RTS1: JP7.DTR Q5.3 R20.1
5V_RTS2: JP13.DTR Q8.3 R33.1
5V_RTS3: JP19.DTR Q11.3 R46.1
5V_RTS4: JP25.DTR Q14.3 R59.1
5V_RTS5: JP31.DTR Q17.3 R72.1
5V_RTS6: JP37.DTR Q20.3 R85.1
5V_RTS7: JP43.DTR Q23.3 R98.1
5V_RX: JP1.RXI R8.2
5V_RX1: JP7.RXI R21.2
5V_RX2: JP13.RXI R34.2
5V_RX3: JP19.RXI R47.2
5V_RX4: JP25.RXI R60.2
5V_RX5: JP31.RXI R73.2
5V_RX6: JP37.RXI R86.2
5V_RX7: JP43.RXI R99.2
5V_TX: JP1.TXO Q1.3 R5.1
5V_TX1: JP7.TXO Q4.3 R18.1
5V_TX2: JP13.TXO Q7.3 R31.1
5V_TX3: JP19.TXO Q10.3 R44.1
5V_TX4: JP25.TXO Q13.3 R57.1
5V_TX5: JP31.TXO Q16.3 R70.1
5V_TX6: JP37.TXO Q19.3 R83.1
5V_TX7: JP43.TXO Q22.3 R96.1
!RESET: JP3.1 R10.1 U1.44
!RESET1: JP9.1 R23.1 U3.44
!RESET2: JP15.1 R36.1 U5.44
!RESET3: JP21.1 R49.1 U7.44
!RESET4: JP27.1 R62.1 U9.44
!RESET5: JP33.1 R75.1 U11.44
!RESET6: JP39.1 R88.1 U13.44
!RESET7: JP45.1 R101.1 U15.44
AIO_1: JP2.8 U1.12
AIO_2: JP8.8 U3.12
AIO_3: JP14.8 U5.12
AIO_4: JP20.8 U7.12
AIO_5: JP26.8 U9.12
AIO_6: JP32.8 U11.12
AIO_7: JP38.8 U13.12
AIO_8: JP44.8 U15.12
CAP_SENSE_1: JP2.4 U1.7
CAP_SENSE_2: JP2.7 U1.10
CAP_SENSE_3: JP2.6 U1.9
CAP_SENSE_4: JP2.5 U1.8
CAP_SENSE_5: JP8.6 U3.9
CAP_SENSE_6: JP8.5 U3.8
CAP_SENSE_7: JP8.4 U3.7
CAP_SENSE_8: JP8.7 U3.10
CAP_SENSE_9: JP14.6 U5.9
CAP_SENSE_10: JP14.5 U5.8
CAP_SENSE_11: JP14.4 U5.7
CAP_SENSE_12: JP14.7 U5.10
CAP_SENSE_13: JP20.6 U7.9
CAP_SENSE_14: JP20.5 U7.8
CAP_SENSE_15: JP20.4 U7.7
CAP_SENSE_16: JP20.7 U7.10
CAP_SENSE_17: JP26.6 U9.9
CAP_SENSE_18: JP26.5 U9.8
CAP_SENSE_19: JP26.4 U9.7
CAP_SENSE_20: JP26.7 U9.10
CAP_SENSE_21: JP32.6 U11.9
CAP_SENSE_22: JP32.5 U11.8
CAP_SENSE_23: JP32.4 U11.7
CAP_SENSE_24: JP32.7 U11.10
CAP_SENSE_25: JP38.6 U13.9
CAP_SENSE_26: JP38.5 U13.8
CAP_SENSE_27: JP38.4 U13.7
CAP_SENSE_28: JP38.7 U13.10
CAP_SENSE_29: JP44.6 U15.9
CAP_SENSE_30: JP44.5 U15.8
CAP_SENSE_31: JP44.4 U15.7
CAP_SENSE_32: JP44.7 U15.10
CHG_EXT: Q3.1 U1.29
CHG_EXT1: Q6.1 U3.29
CHG_EXT2: Q9.1 U5.29
CHG_EXT3: Q12.1 U7.29
CHG_EXT4: Q15.1 U9.29
CHG_EXT5: Q18.1 U11.29
CHG_EXT6: Q21.1 U13.29
CHG_EXT7: Q24.1 U15.29
CTS: JP3.10 R9.1 U1.40
CTS1: JP9.10 R22.1 U3.40
CTS2: JP15.10 R35.1 U5.40
CTS3: JP21.10 R48.1 U7.40
CTS4: JP27.10 R61.1 U9.40
CTS5: JP33.10 R74.1 U11.40
CTS6: JP39.10 R87.1 U13.40
CTS7: JP45.10 R100.1 U15.40
GND: C1.C C2.2 C3.C C4.2 JP1.GND JP3.11 JP4.5 JP5.1 JP6.2 U1.1 U1.2 U1.3 U1.4 U1.11 U1.22 U1.27 U2.2
GND1: C5.2 C6.C C7.C C8.2 JP7.GND JP9.11 JP10.5 JP11.1 JP12.2 U3.1 U3.2 U3.3 U3.4 U3.11 U3.22 U3.27 U4.2
GND2: C9.2 C10.C C11.C C12.2 JP13.GND JP15.11 JP16.5 JP17.1 JP18.2 U5.1 U5.2 U5.3 U5.4 U5.11 U5.22 U5.27 U6.2
GND3: C13.2 C14.C C15.C C16.2 JP19.GND JP21.11 JP22.5 JP23.1 JP24.2 U7.1 U7.2 U7.3 U7.4 U7.11 U7.22 U7.27 U8.2
GND4: C17.2 C18.C C19.C C20.2 JP25.GND JP27.11 JP28.5 JP29.1 JP30.2 U9.1 U9.2 U9.3 U9.4 U9.11 U9.22 U9.27 U10.2
GND5: C21.2 C22.C C23.C C24.2 JP31.GND JP33.11 JP34.5 JP35.1 JP36.2 U11.1 U11.2 U11.3 U11.4 U11.11 U11.22 U11.27 U12.2
GND6: C25.2 C26.C C27.C C28.2 JP37.GND JP39.11 JP40.5 JP41.1 JP42.2 U13.1 U13.2 U13.3 U13.4 U13.11 U13.22 U13.27 U14.2
GND7: C29.2 C30.C C31.C C32.2 JP43.GND JP45.11 JP46.5 JP47.1 JP48.2 U15.1 U15.2 U15.3 U15.4 U15.11 U15.22 U15.27 U16.2
LED_0: D2.C JP2.3 U1.37
LED_1: D3.C JP2.2 U1.38
LED_2: D1.C JP2.1 U1.39
LED_3: D7.C JP8.1 U3.39
LED_4: D9.C JP8.2 U3.38
LED_5: D8.C JP8.3 U3.37
LED_6: D13.C JP14.1 U5.39
LED_7: D15.C JP14.2 U5.38
LED_8: D14.C JP14.3 U5.37
LED_9: D19.C JP20.1 U7.39
LED_10: D21.C JP20.2 U7.38
LED_11: D20.C JP20.3 U7.37
LED_12: D25.C JP26.1 U9.39
LED_13: D27.C JP26.2 U9.38
LED_14: D26.C JP26.3 U9.37
LED_15: D31.C JP32.1 U11.39
LED_16: D33.C JP32.2 U11.38
LED_17: D32.C JP32.3 U11.37
LED_18: D37.C JP38.1 U13.39
LED_19: D39.C JP38.2 U13.38
LED_20: D38.C JP38.3 U13.37
LED_21: D43.C JP44.1 U15.39
LED_22: D45.C JP44.2 U15.38
LED_23: D44.C JP44.3 U15.37
MIC_BIAS_A: JP5.6 U1.17
MIC_BIAS_A1: JP11.6 U3.17
MIC_BIAS_A2: JP17.6 U5.17
MIC_BIAS_A3: JP23.6 U7.17
MIC_BIAS_A4: JP29.6 U9.17
MIC_BIAS_A5: JP35.6 U11.17
MIC_BIAS_A6: JP41.6 U13.17
MIC_BIAS_A7: JP47.6 U15.17
MIC_LN: JP5.3 U1.20
MIC_LN1: JP11.3 U3.20
MIC_LN2: JP17.3 U5.20
MIC_LN3: JP23.3 U7.20
MIC_LN4: JP29.3 U9.20
MIC_LN5: JP35.3 U11.20
MIC_LN6: JP41.3 U13.20
MIC_LN7: JP47.3 U15.20
MIC_LP: JP5.2 U1.21
MIC_LP1: JP11.2 U3.21
MIC_LP2: JP17.2 U5.21
MIC_LP3: JP23.2 U7.21
MIC_LP4: JP29.2 U9.21
MIC_LP5: JP35.2 U11.21
MIC_LP6: JP41.2 U13.21
MIC_LP7: JP47.2 U15.21
MIC_RN: JP5.5 U1.18
MIC_RN1: JP11.5 U3.18
MIC_RN2: JP17.5 U5.18
MIC_RN3: JP23.5 U7.18
MIC_RN4: JP29.5 U9.18
MIC_RN5: JP35.5 U11.18
MIC_RN6: JP41.5 U13.18
MIC_RN7: JP47.5 U15.18
MIC_RP: JP5.4 U1.19
MIC_RP1: JP11.4 U3.19
MIC_RP2: JP17.4 U5.19
MIC_RP3: JP23.4 U7.19
MIC_RP4: JP29.4 U9.19
MIC_RP5: JP35.4 U11.19
MIC_RP6: JP41.4 U13.19
MIC_RP7: JP47.4 U15.19
N$1: D9.A R16.1
N$2: D3.A R3.1
N$3: D8.A R17.1
N$4: D7.A R15.1
N$5: C8.1 R25.1
N$6: D2.A R4.1
N$7: D1.A R2.1
N$8: D15.A R29.1
N$9: D14.A R30.1
N$10: D13.A R28.1
N$11: C12.1 R38.1
N$12: D21.A R42.1
N$13: D20.A R43.1
N$14: D19.A R41.1
N$15: C16.1 R51.1
N$16: D27.A R55.1
N$17: D26.A R56.1
N$18: D25.A R54.1
N$19: C20.1 R64.1
N$20: D33.A R68.1
N$21: D32.A R69.1
N$22: D31.A R67.1
N$23: C24.1 R77.1
N$24: D39.A R81.1
N$25: D38.A R82.1
N$26: D37.A R80.1
N$27: C28.1 R90.1
N$28: C4.1 R12.1
N$29: D45.A R94.1
N$30: D44.A R95.1
N$31: D43.A R93.1
N$32: C32.1 R103.1
PCM_CLK/CLK: JP3.4 U1.47
PCM_CLK/CLK1: JP9.4 U3.47
PCM_CLK/CLK2: JP15.4 U5.47
PCM_CLK/CLK3: JP21.4 U7.47
PCM_CLK/CLK4: JP27.4 U9.47
PCM_CLK/CLK5: JP33.4 U11.47
PCM_CLK/CLK6: JP39.4 U13.47
PCM_CLK/CLK7: JP45.4 U15.47
PCM_IN/MOSI: JP3.2 U1.49
PCM_IN/MOSI1: JP9.2 U3.49
PCM_IN/MOSI2: JP15.2 U5.49
PCM_IN/MOSI3: JP21.2 U7.49
PCM_IN/MOSI4: JP27.2 U9.49
PCM_IN/MOSI5: JP33.2 U11.49
PCM_IN/MOSI6: JP39.2 U13.49
PCM_IN/MOSI7: JP45.2 U15.49
PCM_OUT/MISO: JP3.3 U1.48
PCM_OUT/MISO1: JP9.3 U3.48
PCM_OUT/MISO2: JP15.3 U5.48
PCM_OUT/MISO3: JP21.3 U7.48
PCM_OUT/MISO4: JP27.3 U9.48
PCM_OUT/MISO5: JP33.3 U11.48
PCM_OUT/MISO6: JP39.3 U13.48
PCM_OUT/MISO7: JP45.3 U15.48
PCM_SYNC/CSB: JP3.5 U1.46
PCM_SYNC/CSB1: JP9.5 U3.46
PCM_SYNC/CSB2: JP15.5 U5.46
PCM_SYNC/CSB3: JP21.5 U7.46
PCM_SYNC/CSB4: JP27.5 U9.46
PCM_SYNC/CSB5: JP33.5 U11.46
PCM_SYNC/CSB6: JP39.5 U13.46
PCM_SYNC/CSB7: JP45.5 U15.46
PIO_0: JP2.11 U1.23
PIO_1: JP2.12 U1.24
PIO_2: JP2.16 U1.50
PIO_3: JP2.15 U1.51
PIO_4: JP2.14 U1.26
PIO_5: JP2.13 U1.25
PIO_6: JP2.9 U1.5
PIO_7: JP2.10 U1.6
PIO_8: JP8.11 U3.23
PIO_9: JP8.13 U3.25
PIO_10: JP8.9 U3.5
PIO_11: JP8.10 U3.6
PIO_12: JP8.14 U3.26
PIO_13: JP8.15 U3.51
PIO_14: JP8.16 U3.50
PIO_15: JP8.12 U3.24
PIO_16: JP14.11 U5.23
PIO_17: JP14.13 U5.25
PIO_18: JP14.9 U5.5
PIO_19: JP14.10 U5.6
PIO_20: JP14.14 U5.26
PIO_21: JP14.15 U5.51
PIO_22: JP14.16 U5.50
PIO_23: JP14.12 U5.24
PIO_24: JP20.11 U7.23
PIO_25: JP20.13 U7.25
PIO_26: JP20.9 U7.5
PIO_27: JP20.10 U7.6
PIO_28: JP20.14 U7.26
PIO_29: JP20.15 U7.51
PIO_30: JP20.16 U7.50
PIO_31: JP20.12 U7.24
PIO_32: JP26.11 U9.23
PIO_33: JP26.13 U9.25
PIO_34: JP26.9 U9.5
PIO_35: JP26.10 U9.6
PIO_36: JP26.14 U9.26
PIO_37: JP26.15 U9.51
PIO_38: JP26.16 U9.50
PIO_39: JP26.12 U9.24
PIO_40: JP32.11 U11.23
PIO_41: JP32.13 U11.25
PIO_42: JP32.9 U11.5
PIO_43: JP32.10 U11.6
PIO_44: JP32.14 U11.26
PIO_45: JP32.15 U11.51
PIO_46: JP32.16 U11.50
PIO_47: JP32.12 U11.24
PIO_48: JP38.11 U13.23
PIO_49: JP38.13 U13.25
PIO_50: JP38.9 U13.5
PIO_51: JP38.10 U13.6
PIO_52: JP38.14 U13.26
PIO_53: JP38.15 U13.51
PIO_54: JP38.16 U13.50
PIO_55: JP38.12 U13.24
PIO_56: JP44.11 U15.23
PIO_57: JP44.13 U15.25
PIO_58: JP44.9 U15.5
PIO_59: JP44.10 U15.6
PIO_60: JP44.14 U15.26
PIO_61: JP44.15 U15.51
PIO_62: JP44.16 U15.50
PIO_63: JP44.12 U15.24
RTS: JP3.7 Q2.2 R6.1 U1.43
RTS1: JP9.7 Q5.2 R19.1 U3.43
RTS2: JP15.7 Q8.2 R32.1 U5.43
RTS3: JP21.7 Q11.2 R45.1 U7.43
RTS4: JP27.7 Q14.2 R58.1 U9.43
RTS5: JP33.7 Q17.2 R71.1 U11.43
RTS6: JP39.7 Q20.2 R84.1 U13.43
RTS7: JP45.7 Q23.2 R97.1 U15.43
RX: JP3.8 R8.1 U1.42
RX1: JP9.8 R21.1 U3.42
RX2: JP15.8 R34.1 U5.42
RX3: JP21.8 R47.1 U7.42
RX4: JP27.8 R60.1 U9.42
RX5: JP33.8 R73.1 U11.42
RX6: JP39.8 R86.1 U13.42
RX7: JP45.8 R99.1 U15.42
SPI_!PCM: JP3.6 R13.1 U1.45
SPI_!PCM1: JP9.6 R26.1 U3.45
SPI_!PCM2: JP15.6 R39.1 U5.45
SPI_!PCM3: JP21.6 R52.1 U7.45
SPI_!PCM4: JP27.6 R65.1 U9.45
SPI_!PCM5: JP33.6 R78.1 U11.45
SPI_!PCM6: JP39.6 R91.1 U13.45
SPI_!PCM7: JP45.6 R104.1 U15.45
SPKR_LN: JP4.1 U1.13
SPKR_LN1: JP10.1 U3.13
SPKR_LN2: JP16.1 U5.13
SPKR_LN3: JP22.1 U7.13
SPKR_LN4: JP28.1 U9.13
SPKR_LN5: JP34.1 U11.13
SPKR_LN6: JP40.1 U13.13
SPKR_LN7: JP46.1 U15.13
SPKR_LP: JP4.2 U1.14
SPKR_LP1: JP10.2 U3.14
SPKR_LP2: JP16.2 U5.14
SPKR_LP3: JP22.2 U7.14
SPKR_LP4: JP28.2 U9.14
SPKR_LP5: JP34.2 U11.14
SPKR_LP6: JP40.2 U13.14
SPKR_LP7: JP46.2 U15.14
SPKR_RN: JP4.3 U1.15
SPKR_RN1: JP10.3 U3.15
SPKR_RN2: JP16.3 U5.15
SPKR_RN3: JP22.3 U7.15
SPKR_RN4: JP28.3 U9.15
SPKR_RN5: JP34.3 U11.15
SPKR_RN6: JP40.3 U13.15
SPKR_RN7: JP46.3 U15.15
SPKR_RP: JP4.4 U1.16
SPKR_RP1: JP10.4 U3.16
SPKR_RP2: JP16.4 U5.16
SPKR_RP3: JP22.4 U7.16
SPKR_RP4: JP28.4 U9.16
SPKR_RP5: JP34.4 U11.16
SPKR_RP6: JP40.4 U13.16
SPKR_RP7: JP46.4 U15.16
TX: JP3.9 Q1.2 R1.1 U1.41
TX1: JP9.9 Q4.2 R14.1 U3.41
TX2: JP15.9 Q7.2 R27.1 U5.41
TX3: JP21.9 Q10.2 R40.1 U7.41
TX4: JP27.9 Q13.2 R53.1 U9.41
TX5: JP33.9 Q16.2 R66.1 U11.41
TX6: JP39.9 Q19.2 R79.1 U13.41
TX7: JP45.9 Q22.2 R92.1 U15.41
USB_N: JP3.13 U1.35
USB_N1: JP9.13 U3.35
USB_N2: JP15.13 U5.35
USB_N3: JP21.13 U7.35
USB_N4: JP27.13 U9.35
USB_N5: JP33.13 U11.35
USB_N6: JP39.13 U13.35
USB_N7: JP45.13 U15.35
USB_P: JP3.12 U1.36
USB_P1: JP9.12 U3.36
USB_P2: JP15.12 U5.36
USB_P3: JP21.12 U7.36
USB_P4: JP27.12 U9.36
USB_P5: JP33.12 U11.36
USB_P6: JP39.12 U13.36
USB_P7: JP45.12 U15.36
V_BAT: D4.A JP6.1 R11.1 R12.2 U1.32
V_BAT1: D10.A JP12.1 R24.1 R25.2 U3.32
V_BAT2: D16.A JP18.1 R37.1 R38.2 U5.32
V_BAT3: D22.A JP24.1 R50.1 R51.2 U7.32
V_BAT4: D28.A JP30.1 R63.1 R64.2 U9.32
V_BAT5: D34.A JP36.1 R76.1 R77.2 U11.32
V_BAT6: D40.A JP42.1 R89.1 R90.2 U13.32
V_BAT7: D46.A JP48.1 R102.1 R103.2 U15.32
V_FTDI: D5.A JP1.VCC
V_FTDI1: D11.A JP7.VCC
V_FTDI2: D17.A JP13.VCC
V_FTDI3: D23.A JP19.VCC
V_FTDI4: D29.A JP25.VCC
V_FTDI5: D35.A JP31.VCC
V_FTDI6: D41.A JP37.VCC
V_FTDI7: D47.A JP43.VCC
V_USB: D6.A JP3.14
V_USB1: D12.A JP9.14
V_USB2: D18.A JP15.14
V_USB3: D24.A JP21.14
V_USB4: D30.A JP27.14
V_USB5: D36.A JP33.14
V_USB6: D42.A JP39.14
V_USB7: D48.A JP45.14
VBAT_SENSE: Q3.3 R11.2 U1.31
VBAT_SENSE1: Q6.3 R24.2 U3.31
VBAT_SENSE2: Q9.3 R37.2 U5.31
VBAT_SENSE3: Q12.3 R50.2 U7.31
VBAT_SENSE4: Q15.3 R63.2 U9.31
VBAT_SENSE5: Q18.3 R76.2 U11.31
VBAT_SENSE6: Q21.3 R89.2 U13.31
VBAT_SENSE7: Q24.3 R102.2 U15.31
VIN: C3.A D4.C D5.C D6.C Q3.2 R5.2 R7.2 U1.30 U2.1 U2.3
VIN1: C6.A D10.C D11.C D12.C Q6.2 R18.2 R20.2 U3.30 U4.1 U4.3
VIN2: C10.A D16.C D17.C D18.C Q9.2 R31.2 R33.2 U5.30 U6.1 U6.3
VIN3: C14.A D22.C D23.C D24.C Q12.2 R44.2 R46.2 U7.30 U8.1 U8.3
VIN4: C18.A D28.C D29.C D30.C Q15.2 R57.2 R59.2 U9.30 U10.1 U10.3
VIN5: C22.A D34.C D35.C D36.C Q18.2 R70.2 R72.2 U11.30 U12.1 U12.3
VIN6: C26.A D40.C D41.C D42.C Q21.2 R83.2 R85.2 U13.30 U14.1 U14.3
VIN7: C30.A D46.C D47.C D48.C Q24.2 R96.2 R98.2 U15.30 U16.1 U16.3
VREGEN: JP3.15 U1.28
VREGEN1: JP9.15 U3.28
VREGEN2: JP15.15 U5.28
VREGEN3: JP21.15 U7.28
VREGEN4: JP27.15 U9.28
VREGEN5: JP33.15 U11.28
VREGEN6: JP39.15 U13.28
VREGEN7: JP45.15 U15.28

## Tracks (layer width: path | path; a pad name or v marks a point on that pad's centre or on a via)
3.3V  (via drill 0.51)
  Top 0.203: R10.2 R13.2 13.8,32.68 v13.97,32.51 | v43.18,29.21 41.53,29.21 40.51,30.23 29.97,30.23 29.84,30.1 v29.21,30.1 v29.2,30.09 29.2,29.08 28.82,28.7 U1.33 | v11.3,13.84 11.85,13.3 R4.2 R3.2 R2.2
  Top 0.254: Q1.1 50.48,20.73 R1.2 50.38,21.93 50.8,22.35 v50.8,24.64 49.53,24.64 48.9,24 v48.9,22.48 | Q2.1 44.03,19.49 R6.2 44.03,21.42 44.32,21.72 v45.97,21.72 | 67.31,34.8 57.02,34.8 v55.63,33.4 | v46.99,29.08 45.09,29.08 44.96,29.21 v43.18,29.21
  Top 0.406: 66.17,28.46 66.17,27.43 66.04,27.3 65.15,27.3 64.77,26.92 64.77,26.29 64.42,25.94 U2.5
  Top 0.813: JP4.6 67.31,34.8 67.31,33.53 66.17,32.38 C1.A | C1.A | C1.A 66.17,28.46 C2.1
  Bottom 0.203: v29.21,30.1 28.7,30.1 28.57,30.23 24.89,30.23 24.51,29.84 24.51,28.32 23.75,27.56 23.24,27.56 22.86,27.18 22.86,26.8 22.61,26.54 21.08,26.54 20.83,26.8 20.83,27.69 20.57,27.94 18.41,27.94 18.16,28.19 18.16,32.38 18.03,32.51 v13.97,32.51 13.97,31.24 14.22,30.99 14.22,22.23 13.97,21.97 10.92,21.97 10.67,21.72 10.67,14.48 v11.3,13.84
  Bottom 0.254: v55.63,33.4 55.63,31.24 53.47,29.08 49.56,29.08 | 49.56,29.08 v46.99,29.08 | 49.56,29.08 49.56,25.88 v50.8,24.64 | v48.9,22.48 46.74,22.48 v45.97,21.72
3.3V1  (via drill 0.51)
  Top 0.203: R23.2 R26.2 13.8,66.21 v13.97,66.04 | v43.18,62.74 41.53,62.74 40.51,63.75 29.97,63.75 29.84,63.63 v29.21,63.63 v29.2,63.62 29.2,62.6 28.82,62.22 U3.33 | v11.3,47.37 11.85,46.82 R17.2 R16.2 R15.2
  Top 0.254: Q4.1 50.48,54.26 R14.2 50.38,55.46 50.8,55.88 v50.8,58.17 49.53,58.17 48.9,57.53 v48.9,56.01 | Q5.1 44.03,53.02 R19.2 44.03,54.95 44.32,55.24 v45.97,55.24 | 67.31,68.33 57.02,68.33 v55.63,66.93 | v46.99,62.61 45.09,62.61 44.96,62.74 v43.18,62.74
  Top 0.406: 66.17,61.99 66.17,60.96 66.04,60.83 65.15,60.83 64.77,60.45 64.77,59.82 64.42,59.47 U4.5
  Top 0.813: JP10.6 67.31,68.33 67.31,67.06 66.17,65.91 C7.A | C7.A | C7.A 66.17,61.99 C5.1
  Bottom 0.203: v29.21,63.63 28.7,63.63 28.57,63.75 24.89,63.75 24.51,63.37 24.51,61.85 23.75,61.09 23.24,61.09 22.86,60.71 22.86,60.33 22.61,60.07 21.08,60.07 20.83,60.33 20.83,61.21 20.57,61.47 18.41,61.47 18.16,61.72 18.16,65.91 18.03,66.04 v13.97,66.04 13.97,64.77 14.22,64.52 14.22,55.75 13.97,55.5 10.92,55.5 10.67,55.24 10.67,48.01 v11.3,47.37
  Bottom 0.254: v55.63,66.93 55.63,64.77 53.47,62.61 49.56,62.61 | 49.56,62.61 v46.99,62.61 | 49.56,62.61 49.56,59.4 v50.8,58.17 | v48.9,56.01 46.74,56.01 v45.97,55.24
3.3V2  (via drill 0.51)
  Top 0.203: R36.2 R39.2 13.8,99.73 v13.97,99.57 | v43.18,96.27 41.53,96.27 40.51,97.28 29.97,97.28 29.84,97.16 v29.21,97.16 v29.2,97.15 29.2,96.13 28.82,95.75 U5.33 | v11.3,80.9 11.85,80.35 R30.2 R29.2 R28.2
  Top 0.254: Q7.1 50.48,87.78 R27.2 50.38,88.99 50.8,89.41 v50.8,91.69 49.53,91.69 48.9,91.06 v48.9,89.53 | Q8.1 44.03,86.54 R32.2 44.03,88.48 44.32,88.77 v45.97,88.77 | 67.31,101.85 57.02,101.85 v55.63,100.46 | v46.99,96.14 45.09,96.14 44.96,96.27 v43.18,96.27
  Top 0.406: 66.17,95.52 66.17,94.49 66.04,94.36 65.15,94.36 64.77,93.98 64.77,93.34 64.42,92.99 U6.5
  Top 0.813: JP16.6 67.31,101.85 67.31,100.58 66.17,99.44 C11.A | C11.A | C11.A 66.17,95.52 C9.1
  Bottom 0.203: v29.21,97.16 28.7,97.16 28.57,97.28 24.89,97.28 24.51,96.9 24.51,95.38 23.75,94.61 23.24,94.61 22.86,94.23 22.86,93.85 22.61,93.6 21.08,93.6 20.83,93.85 20.83,94.74 20.57,95 18.41,95 18.16,95.25 18.16,99.44 18.03,99.57 v13.97,99.57 13.97,98.3 14.22,98.04 14.22,89.28 13.97,89.03 10.92,89.03 10.67,88.77 10.67,81.53 v11.3,80.9
  Bottom 0.254: v55.63,100.46 55.63,98.3 53.47,96.14 49.56,96.14 | 49.56,96.14 v46.99,96.14 | 49.56,96.14 49.56,92.93 v50.8,91.69 | v48.9,89.53 46.74,89.53 v45.97,88.77
3.3V3  (via drill 0.51)
  Top 0.203: R49.2 R52.2 13.8,133.26 v13.97,133.1 | v43.18,129.79 41.53,129.79 40.51,130.81 29.97,130.81 29.84,130.68 v29.21,130.68 v29.2,130.68 29.2,129.66 28.82,129.28 U7.33 | v11.3,114.43 11.85,113.88 R43.2 R42.2 R41.2
  Top 0.254: Q10.1 50.48,121.31 R40.2 50.38,122.52 50.8,122.94 v50.8,125.22 49.53,125.22 48.9,124.59 v48.9,123.06 | Q11.1 44.03,120.07 R45.2 44.03,122.01 44.32,122.3 v45.97,122.3 | 67.31,135.38 57.02,135.38 v55.63,133.99 | v46.99,129.67 45.09,129.67 44.96,129.79 v43.18,129.79
  Top 0.406: 66.17,129.04 66.17,128.02 66.04,127.89 65.15,127.89 64.77,127.51 64.77,126.87 64.42,126.52 U8.5
  Top 0.813: JP22.6 67.31,135.38 67.31,134.11 66.17,132.97 C15.A | C15.A | C15.A 66.17,129.04 C13.1
  Bottom 0.203: v29.21,130.68 28.7,130.68 28.57,130.81 24.89,130.81 24.51,130.43 24.51,128.91 23.75,128.14 23.24,128.14 22.86,127.76 22.86,127.38 22.61,127.13 21.08,127.13 20.83,127.38 20.83,128.27 20.57,128.52 18.41,128.52 18.16,128.78 18.16,132.97 18.03,133.1 v13.97,133.1 13.97,131.83 14.22,131.57 14.22,122.81 13.97,122.56 10.92,122.56 10.67,122.3 10.67,115.06 v11.3,114.43
  Bottom 0.254: v55.63,133.99 55.63,131.83 53.47,129.67 49.56,129.67 | 49.56,129.67 v46.99,129.67 | 49.56,129.67 49.56,126.46 v50.8,125.22 | v48.9,123.06 46.74,123.06 v45.97,122.3
3.3V4  (via drill 0.51)
  Top 0.203: R62.2 R65.2 81.11,32.68 v81.28,32.51 | v110.49,29.21 108.84,29.21 107.82,30.23 97.28,30.23 97.16,30.1 v96.52,30.1 v96.51,30.09 96.51,29.08 96.13,28.7 U9.33 | v78.61,13.84 79.16,13.3 R56.2 R55.2 R54.2
  Top 0.254: Q13.1 117.79,20.73 R53.2 117.69,21.93 118.11,22.35 v118.11,24.64 116.84,24.64 116.2,24 v116.2,22.48 | Q14.1 111.34,19.49 R58.2 111.34,21.42 111.63,21.72 v113.28,21.72 | 134.62,34.8 124.33,34.8 v122.94,33.4 | v114.3,29.08 112.39,29.08 112.27,29.21 v110.49,29.21
  Top 0.406: 133.48,28.46 133.48,27.43 133.35,27.3 132.46,27.3 132.08,26.92 132.08,26.29 131.73,25.94 U10.5
  Top 0.813: JP28.6 134.62,34.8 134.62,33.53 133.48,32.38 C19.A | C19.A | C19.A 133.48,28.46 C17.1
  Bottom 0.203: v96.52,30.1 96.01,30.1 95.89,30.23 92.2,30.23 91.82,29.84 91.82,28.32 91.06,27.56 90.55,27.56 90.17,27.18 90.17,26.8 89.92,26.54 88.39,26.54 88.14,26.8 88.14,27.69 87.88,27.94 85.72,27.94 85.47,28.19 85.47,32.38 85.34,32.51 v81.28,32.51 81.28,31.24 81.53,30.99 81.53,22.23 81.28,21.97 78.23,21.97 77.98,21.72 77.98,14.48 v78.61,13.84
  Bottom 0.254: v122.94,33.4 122.94,31.24 120.78,29.08 116.87,29.08 | 116.87,29.08 v114.3,29.08 | 116.87,29.08 116.87,25.88 v118.11,24.64 | v116.2,22.48 114.05,22.48 v113.28,21.72
3.3V5  (via drill 0.51)
  Top 0.203: R75.2 R78.2 81.11,66.21 v81.28,66.04 | v110.49,62.74 108.84,62.74 107.82,63.75 97.28,63.75 97.16,63.63 v96.52,63.63 v96.51,63.62 96.51,62.6 96.13,62.22 U11.33 | v78.61,47.37 79.16,46.82 R69.2 R68.2 R67.2
  Top 0.254: Q16.1 117.79,54.26 R66.2 117.69,55.46 118.11,55.88 v118.11,58.17 116.84,58.17 116.2,57.53 v116.2,56.01 | Q17.1 111.34,53.02 R71.2 111.34,54.95 111.63,55.24 v113.28,55.24 | 134.62,68.33 124.33,68.33 v122.94,66.93 | v114.3,62.61 112.39,62.61 112.27,62.74 v110.49,62.74
  Top 0.406: 133.48,61.99 133.48,60.96 133.35,60.83 132.46,60.83 132.08,60.45 132.08,59.82 131.73,59.47 U12.5
  Top 0.813: JP34.6 134.62,68.33 134.62,67.06 133.48,65.91 C23.A | C23.A | C23.A 133.48,61.99 C21.1
  Bottom 0.203: v96.52,63.63 96.01,63.63 95.89,63.75 92.2,63.75 91.82,63.37 91.82,61.85 91.06,61.09 90.55,61.09 90.17,60.71 90.17,60.33 89.92,60.07 88.39,60.07 88.14,60.33 88.14,61.21 87.88,61.47 85.72,61.47 85.47,61.72 85.47,65.91 85.34,66.04 v81.28,66.04 81.28,64.77 81.53,64.52 81.53,55.75 81.28,55.5 78.23,55.5 77.98,55.24 77.98,48.01 v78.61,47.37
  Bottom 0.254: v122.94,66.93 122.94,64.77 120.78,62.61 116.87,62.61 | 116.87,62.61 v114.3,62.61 | 116.87,62.61 116.87,59.4 v118.11,58.17 | v116.2,56.01 114.05,56.01 v113.28,55.24
3.3V6  (via drill 0.51)
  Top 0.203: R88.2 R91.2 81.11,99.73 v81.28,99.57 | v110.49,96.27 108.84,96.27 107.82,97.28 97.28,97.28 97.16,97.16 v96.52,97.16 v96.51,97.15 96.51,96.13 96.13,95.75 U13.33 | v78.61,80.9 79.16,80.35 R82.2 R81.2 R80.2
  Top 0.254: Q19.1 117.79,87.78 R79.2 117.69,88.99 118.11,89.41 v118.11,91.69 116.84,91.69 116.2,91.06 v116.2,89.53 | Q20.1 111.34,86.54 R84.2 111.34,88.48 111.63,88.77 v113.28,88.77 | 134.62,101.85 124.33,101.85 v122.94,100.46 | v114.3,96.14 112.39,96.14 112.27,96.27 v110.49,96.27
  Top 0.406: 133.48,95.52 133.48,94.49 133.35,94.36 132.46,94.36 132.08,93.98 132.08,93.34 131.73,92.99 U14.5
  Top 0.813: JP40.6 134.62,101.85 134.62,100.58 133.48,99.44 C27.A | C27.A | C27.A 133.48,95.52 C25.1
  Bottom 0.203: v96.52,97.16 96.01,97.16 95.89,97.28 92.2,97.28 91.82,96.9 91.82,95.38 91.06,94.61 90.55,94.61 90.17,94.23 90.17,93.85 89.92,93.6 88.39,93.6 88.14,93.85 88.14,94.74 87.88,95 85.72,95 85.47,95.25 85.47,99.44 85.34,99.57 v81.28,99.57 81.28,98.3 81.53,98.04 81.53,89.28 81.28,89.03 78.23,89.03 77.98,88.77 77.98,81.53 v78.61,80.9
  Bottom 0.254: v122.94,100.46 122.94,98.3 120.78,96.14 116.87,96.14 | 116.87,96.14 v114.3,96.14 | 116.87,96.14 116.87,92.93 v118.11,91.69 | v116.2,89.53 114.05,89.53 v113.28,88.77
3.3V7  (via drill 0.51)
  Top 0.203: R101.2 R104.2 81.11,133.26 v81.28,133.1 | v110.49,129.79 108.84,129.79 107.82,130.81 97.28,130.81 97.16,130.68 v96.52,130.68 v96.51,130.68 96.51,129.66 96.13,129.28 U15.33 | v78.61,114.43 79.16,113.88 R95.2 R94.2 R93.2
  Top 0.254: Q22.1 117.79,121.31 R92.2 117.69,122.52 118.11,122.94 v118.11,125.22 116.84,125.22 116.2,124.59 v116.2,123.06 | Q23.1 111.34,120.07 R97.2 111.34,122.01 111.63,122.3 v113.28,122.3 | 134.62,135.38 124.33,135.38 v122.94,133.99 | v114.3,129.67 112.39,129.67 112.27,129.79 v110.49,129.79
  Top 0.406: 133.48,129.04 133.48,128.02 133.35,127.89 132.46,127.89 132.08,127.51 132.08,126.87 131.73,126.52 U16.5
  Top 0.813: JP46.6 134.62,135.38 134.62,134.11 133.48,132.97 C31.A | C31.A | C31.A 133.48,129.04 C29.1
  Bottom 0.203: v96.52,130.68 96.01,130.68 95.89,130.81 92.2,130.81 91.82,130.43 91.82,128.91 91.06,128.14 90.55,128.14 90.17,127.76 90.17,127.38 89.92,127.13 88.39,127.13 88.14,127.38 88.14,128.27 87.88,128.52 85.72,128.52 85.47,128.78 85.47,132.97 85.34,133.1 v81.28,133.1 81.28,131.83 81.53,131.57 81.53,122.81 81.28,122.56 78.23,122.56 77.98,122.3 77.98,115.06 v78.61,114.43
  Bottom 0.254: v122.94,133.99 122.94,131.83 120.78,129.67 116.87,129.67 | 116.87,129.67 v114.3,129.67 | 116.87,129.67 116.87,126.46 v118.11,125.22 | v116.2,123.06 114.05,123.06 v113.28,122.3
5V_CTS  (via drill 0.51)
  Top 0.203: R9.2 60.83,30.48 v62.87,28.45
  Bottom 0.203: v62.87,28.45 JP1.CTS
5V_CTS1  (via drill 0.51)
  Top 0.203: R22.2 60.83,64.01 v62.87,61.98
  Bottom 0.203: v62.87,61.98 JP7.CTS
5V_CTS2  (via drill 0.51)
  Top 0.203: R35.2 60.83,97.54 v62.87,95.5
  Bottom 0.203: v62.87,95.5 JP13.CTS
5V_CTS3  (via drill 0.51)
  Top 0.203: R48.2 60.83,131.06 v62.87,129.03
  Bottom 0.203: v62.87,129.03 JP19.CTS
5V_CTS4  (via drill 0.51)
  Top 0.203: R61.2 128.14,30.48 v130.18,28.45
  Bottom 0.203: v130.18,28.45 JP25.CTS
5V_CTS5  (via drill 0.51)
  Top 0.203: R74.2 128.14,64.01 v130.18,61.98
  Bottom 0.203: v130.18,61.98 JP31.CTS
5V_CTS6  (via drill 0.51)
  Top 0.203: R87.2 128.14,97.54 v130.18,95.5
  Bottom 0.203: v130.18,95.5 JP37.CTS
5V_CTS7  (via drill 0.51)
  Top 0.203: R100.2 128.14,131.06 v130.18,129.03
  Bottom 0.203: v130.18,129.03 JP43.CTS
5V_RTS
  Top 0.203: R7.1 45.72,16.38 46.1,16 71.88,16 72.39,16.51 JP1.DTR
  Top 0.254: Q2.3 44.24,17.19 44.49,17.44 R7.1
5V_RTS1
  Top 0.203: R20.1 45.72,49.91 46.1,49.53 71.88,49.53 72.39,50.04 JP7.DTR
  Top 0.254: Q5.3 44.24,50.72 44.49,50.97 R20.1
5V_RTS2
  Top 0.203: R33.1 45.72,83.44 46.1,83.06 71.88,83.06 72.39,83.57 JP13.DTR
  Top 0.254: Q8.3 44.24,84.24 44.49,84.49 R33.1
5V_RTS3
  Top 0.203: R46.1 45.72,116.97 46.1,116.59 71.88,116.59 72.39,117.09 JP19.DTR
  Top 0.254: Q11.3 44.24,117.77 44.49,118.02 R46.1
5V_RTS4
  Top 0.203: R59.1 113.03,16.38 113.41,16 139.19,16 139.7,16.51 JP25.DTR
  Top 0.254: Q14.3 111.55,17.19 111.8,17.44 R59.1
5V_RTS5
  Top 0.203: R72.1 113.03,49.91 113.41,49.53 139.19,49.53 139.7,50.04 JP31.DTR
  Top 0.254: Q17.3 111.55,50.72 111.8,50.97 R72.1
5V_RTS6
  Top 0.203: R85.1 113.03,83.44 113.41,83.06 139.19,83.06 139.7,83.57 JP37.DTR
  Top 0.254: Q20.3 111.55,84.24 111.8,84.49 R85.1
5V_RTS7
  Top 0.203: R98.1 113.03,116.97 113.41,116.59 139.19,116.59 139.7,117.09 JP43.DTR
  Top 0.254: Q23.3 111.55,117.77 111.8,118.02 R98.1
5V_RX  (via drill 0.51)
  Top 0.203: R8.2 58.29,29.21 58.42,29.08 v58.42,27.81 | v69.85,27.18 v69.85,24.64
  Bottom 0.203: v58.42,27.81 59.05,27.18 v69.85,27.18 | v69.85,24.64 69.85,21.34 70.36,20.83 JP1.RXI
5V_RX1  (via drill 0.51)
  Top 0.203: R21.2 58.29,62.74 58.42,62.61 v58.42,61.34 | v69.85,60.71 v69.85,58.17
  Bottom 0.203: v58.42,61.34 59.05,60.71 v69.85,60.71 | v69.85,58.17 69.85,54.86 70.36,54.36 JP7.RXI
5V_RX2  (via drill 0.51)
  Top 0.203: R34.2 58.29,96.27 58.42,96.14 v58.42,94.87 | v69.85,94.23 v69.85,91.69
  Bottom 0.203: v58.42,94.87 59.05,94.23 v69.85,94.23 | v69.85,91.69 69.85,88.39 70.36,87.88 JP13.RXI
5V_RX3  (via drill 0.51)
  Top 0.203: R47.2 58.29,129.79 58.42,129.67 v58.42,128.4 | v69.85,127.76 v69.85,125.22
  Bottom 0.203: v58.42,128.4 59.05,127.76 v69.85,127.76 | v69.85,125.22 69.85,121.92 70.36,121.41 JP19.RXI
5V_RX4  (via drill 0.51)
  Top 0.203: R60.2 125.6,29.21 125.73,29.08 v125.73,27.81 | v137.16,27.18 v137.16,24.64
  Bottom 0.203: v125.73,27.81 126.36,27.18 v137.16,27.18 | v137.16,24.64 137.16,21.34 137.67,20.83 JP25.RXI
5V_RX5  (via drill 0.51)
  Top 0.203: R73.2 125.6,62.74 125.73,62.61 v125.73,61.34 | v137.16,60.71 v137.16,58.17
  Bottom 0.203: v125.73,61.34 126.36,60.71 v137.16,60.71 | v137.16,58.17 137.16,54.86 137.67,54.36 JP31.RXI
5V_RX6  (via drill 0.51)
  Top 0.203: R86.2 125.6,96.27 125.73,96.14 v125.73,94.87 | v137.16,94.23 v137.16,91.69
  Bottom 0.203: v125.73,94.87 126.36,94.23 v137.16,94.23 | v137.16,91.69 137.16,88.39 137.67,87.88 JP37.RXI
5V_RX7  (via drill 0.51)
  Top 0.203: R99.2 125.6,129.79 125.73,129.67 v125.73,128.4 | v137.16,127.76 v137.16,125.22
  Bottom 0.203: v125.73,128.4 126.36,127.76 v137.16,127.76 | v137.16,125.22 137.16,121.92 137.67,121.41 JP43.RXI
5V_TX
  Top 0.254: Q1.3 50.59,17.19 50.84,17.44 R5.1 68.11,17.44 68.58,17.91 68.58,22.99 68.96,23.37 JP1.TXO
5V_TX1
  Top 0.254: Q4.3 50.59,50.72 50.84,50.97 R18.1 68.11,50.97 68.58,51.44 68.58,56.52 68.96,56.9 JP7.TXO
5V_TX2
  Top 0.254: Q7.3 50.59,84.24 50.84,84.49 R31.1 68.11,84.49 68.58,84.96 68.58,90.04 68.96,90.42 JP13.TXO
5V_TX3
  Top 0.254: Q10.3 50.59,117.77 50.84,118.02 R44.1 68.11,118.02 68.58,118.49 68.58,123.57 68.96,123.95 JP19.TXO
5V_TX4
  Top 0.254: Q13.3 117.9,17.19 118.15,17.44 R57.1 135.42,17.44 135.89,17.91 135.89,22.99 136.27,23.37 JP25.TXO
5V_TX5
  Top 0.254: Q16.3 117.9,50.72 118.15,50.97 R70.1 135.42,50.97 135.89,51.44 135.89,56.52 136.27,56.9 JP31.TXO
5V_TX6
  Top 0.254: Q19.3 117.9,84.24 118.15,84.49 R83.1 135.42,84.49 135.89,84.96 135.89,90.04 136.27,90.42 JP37.TXO
5V_TX7
  Top 0.254: Q22.3 117.9,117.77 118.15,118.02 R96.1 135.42,118.02 135.89,118.49 135.89,123.57 136.27,123.95 JP43.TXO
!RESET  (via drill 0.38)
  Top 0.203: JP3.1 11.81,37.34 11.43,36.96 R10.1 | U1.44 19.64,32.72 v19.68,32.77
  Bottom 0.203: v19.68,32.77 19.68,35.81 19.56,35.94 16.64,35.94 16.51,36.07 JP3.1
!RESET1  (via drill 0.38)
  Top 0.203: JP9.1 11.81,70.87 11.43,70.48 R23.1 | U3.44 19.64,66.25 v19.68,66.29
  Bottom 0.203: v19.68,66.29 19.68,69.34 19.56,69.47 16.64,69.47 16.51,69.6 JP9.1
!RESET2  (via drill 0.38)
  Top 0.203: JP15.1 11.81,104.39 11.43,104.01 R36.1 | U5.44 19.64,99.78 v19.68,99.82
  Bottom 0.203: v19.68,99.82 19.68,102.87 19.56,103 16.64,103 16.51,103.12 JP15.1
!RESET3  (via drill 0.38)
  Top 0.203: JP21.1 11.81,137.92 11.43,137.54 R49.1 | U7.44 19.64,133.31 v19.68,133.35
  Bottom 0.203: v19.68,133.35 19.68,136.4 19.56,136.53 16.64,136.53 16.51,136.65 JP21.1
!RESET4  (via drill 0.38)
  Top 0.203: JP27.1 79.12,37.34 78.74,36.96 R62.1 | U9.44 86.95,32.72 v87,32.77
  Bottom 0.203: v87,32.77 87,35.81 86.87,35.94 83.95,35.94 83.82,36.07 JP27.1
!RESET5  (via drill 0.38)
  Top 0.203: JP33.1 79.12,70.87 78.74,70.48 R75.1 | U11.44 86.95,66.25 v87,66.29
  Bottom 0.203: v87,66.29 87,69.34 86.87,69.47 83.95,69.47 83.82,69.6 JP33.1
!RESET6  (via drill 0.38)
  Top 0.203: JP39.1 79.12,104.39 78.74,104.01 R88.1 | U13.44 86.95,99.78 v87,99.82
  Bottom 0.203: v87,99.82 87,102.87 86.87,103 83.95,103 83.82,103.12 JP39.1
!RESET7  (via drill 0.38)
  Top 0.203: JP45.1 79.12,137.92 78.74,137.54 R101.1 | U15.44 86.95,133.31 v87,133.35
  Bottom 0.203: v87,133.35 87,136.4 86.87,136.53 83.95,136.53 83.82,136.65 JP45.1
AIO_1
  Top 0.203: U1.12 19.64,16.05 19.81,15.88 23.62,15.88 24.13,15.37 25.78,15.37 26.67,14.48 28.83,14.48 29.34,13.97 30.48,13.97 30.99,13.46 32.64,13.46 33.27,12.83 36.45,12.83 36.83,12.45 JP2.8
AIO_2
  Top 0.203: U3.12 19.64,49.58 19.81,49.4 23.62,49.4 24.13,48.9 25.78,48.9 26.67,48.01 28.83,48.01 29.34,47.5 30.48,47.5 30.99,46.99 32.64,46.99 33.27,46.35 36.45,46.35 36.83,45.97 JP8.8
AIO_3
  Top 0.203: U5.12 19.64,83.1 19.81,82.93 23.62,82.93 24.13,82.42 25.78,82.42 26.67,81.53 28.83,81.53 29.34,81.03 30.48,81.03 30.99,80.52 32.64,80.52 33.27,79.88 36.45,79.88 36.83,79.5 JP14.8
AIO_4
  Top 0.203: U7.12 19.64,116.63 19.81,116.46 23.62,116.46 24.13,115.95 25.78,115.95 26.67,115.06 28.83,115.06 29.34,114.55 30.48,114.55 30.99,114.05 32.64,114.05 33.27,113.41 36.45,113.41 36.83,113.03 JP20.8
AIO_5
  Top 0.203: U9.12 86.95,16.05 87.12,15.88 90.93,15.88 91.44,15.37 93.09,15.37 93.98,14.48 96.14,14.48 96.65,13.97 97.79,13.97 98.3,13.46 99.95,13.46 100.58,12.83 103.76,12.83 104.14,12.45 JP26.8
AIO_6
  Top 0.203: U11.12 86.95,49.58 87.12,49.4 90.93,49.4 91.44,48.9 93.09,48.9 93.98,48.01 96.14,48.01 96.65,47.5 97.79,47.5 98.3,46.99 99.95,46.99 100.58,46.35 103.76,46.35 104.14,45.97 JP32.8
AIO_7
  Top 0.203: U13.12 86.95,83.1 87.12,82.93 90.93,82.93 91.44,82.42 93.09,82.42 93.98,81.53 96.14,81.53 96.65,81.03 97.79,81.03 98.3,80.52 99.95,80.52 100.58,79.88 103.76,79.88 104.14,79.5 JP38.8
AIO_8
  Top 0.203: U15.12 86.95,116.63 87.12,116.46 90.93,116.46 91.44,115.95 93.09,115.95 93.98,115.06 96.14,115.06 96.65,114.55 97.79,114.55 98.3,114.05 99.95,114.05 100.58,113.41 103.76,113.41 104.14,113.03 JP44.8
CAP_SENSE_1
  Top 0.203: U1.7 15.64,13.7 15.88,13.46 22.73,13.46 23.11,13.08 24.89,13.08 25.53,12.45 26.42,12.45 26.67,12.19 JP2.4
CAP_SENSE_2
  Top 0.203: U1.10 18.04,15.49 18.16,15.37 23.37,15.37 23.88,14.86 25.4,14.86 26.29,13.97 28.7,13.97 29.21,13.46 30.23,13.46 30.86,12.83 32.38,12.83 32.89,12.32 33.78,12.32 34.29,11.81 JP2.7
CAP_SENSE_3
  Top 0.203: U1.9 17.24,14.89 17.4,14.73 23.11,14.73 23.62,14.22 25.27,14.22 26.04,13.46 28.45,13.46 28.96,12.95 29.97,12.95 30.73,12.19 31.75,12.19 JP2.6
CAP_SENSE_4
  Top 0.203: U1.8 16.44,14.29 16.64,14.1 22.86,14.1 23.37,13.59 25.15,13.59 25.78,12.95 28.19,12.95 28.7,12.45 29.08,12.45 29.21,12.32 JP2.5
CAP_SENSE_5
  Top 0.203: U3.9 17.24,48.42 17.4,48.26 23.11,48.26 23.62,47.75 25.27,47.75 26.04,46.99 28.45,46.99 28.96,46.48 29.97,46.48 30.73,45.72 31.75,45.72 JP8.6
CAP_SENSE_6
  Top 0.203: U3.8 16.44,47.82 16.64,47.62 22.86,47.62 23.37,47.12 25.15,47.12 25.78,46.48 28.19,46.48 28.7,45.97 29.08,45.97 29.21,45.85 JP8.5
CAP_SENSE_7
  Top 0.203: U3.7 15.64,47.23 15.88,46.99 22.73,46.99 23.11,46.61 24.89,46.61 25.53,45.97 26.42,45.97 26.67,45.72 JP8.4
CAP_SENSE_8
  Top 0.203: U3.10 18.04,49.02 18.16,48.9 23.37,48.9 23.88,48.39 25.4,48.39 26.29,47.5 28.7,47.5 29.21,46.99 30.23,46.99 30.86,46.35 32.38,46.35 32.89,45.85 33.78,45.85 34.29,45.34 JP8.7
CAP_SENSE_9
  Top 0.203: U5.9 17.24,81.95 17.4,81.79 23.11,81.79 23.62,81.28 25.27,81.28 26.04,80.52 28.45,80.52 28.96,80.01 29.97,80.01 30.73,79.25 31.75,79.25 JP14.6
CAP_SENSE_10
  Top 0.203: U5.8 16.44,81.35 16.64,81.15 22.86,81.15 23.37,80.64 25.15,80.64 25.78,80.01 28.19,80.01 28.7,79.5 29.08,79.5 29.21,79.38 JP14.5
CAP_SENSE_11
  Top 0.203: U5.7 15.64,80.75 15.88,80.52 22.73,80.52 23.11,80.14 24.89,80.14 25.53,79.5 26.42,79.5 26.67,79.25 JP14.4
CAP_SENSE_12
  Top 0.203: U5.10 18.04,82.54 18.16,82.42 23.37,82.42 23.88,81.92 25.4,81.92 26.29,81.03 28.7,81.03 29.21,80.52 30.23,80.52 30.86,79.88 32.38,79.88 32.89,79.38 33.78,79.38 34.29,78.87 JP14.7
CAP_SENSE_13